# EAGLE board OPT-FMU-v.0.1 (EAGLE 5.11), part 1 of 3
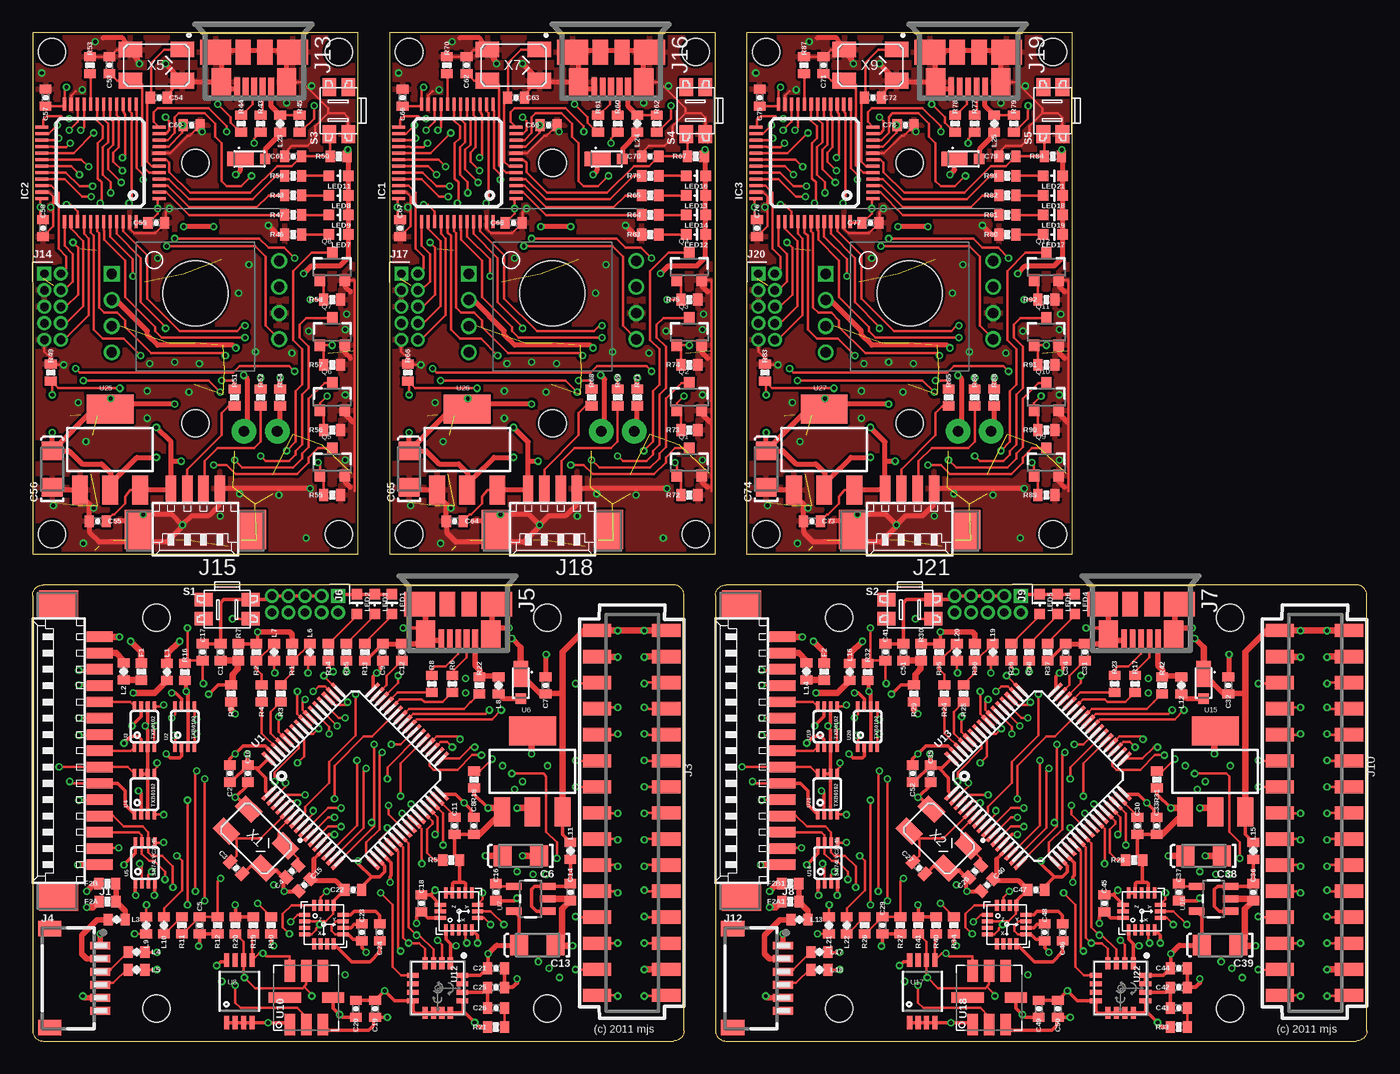
[diagram p0: board, top side]
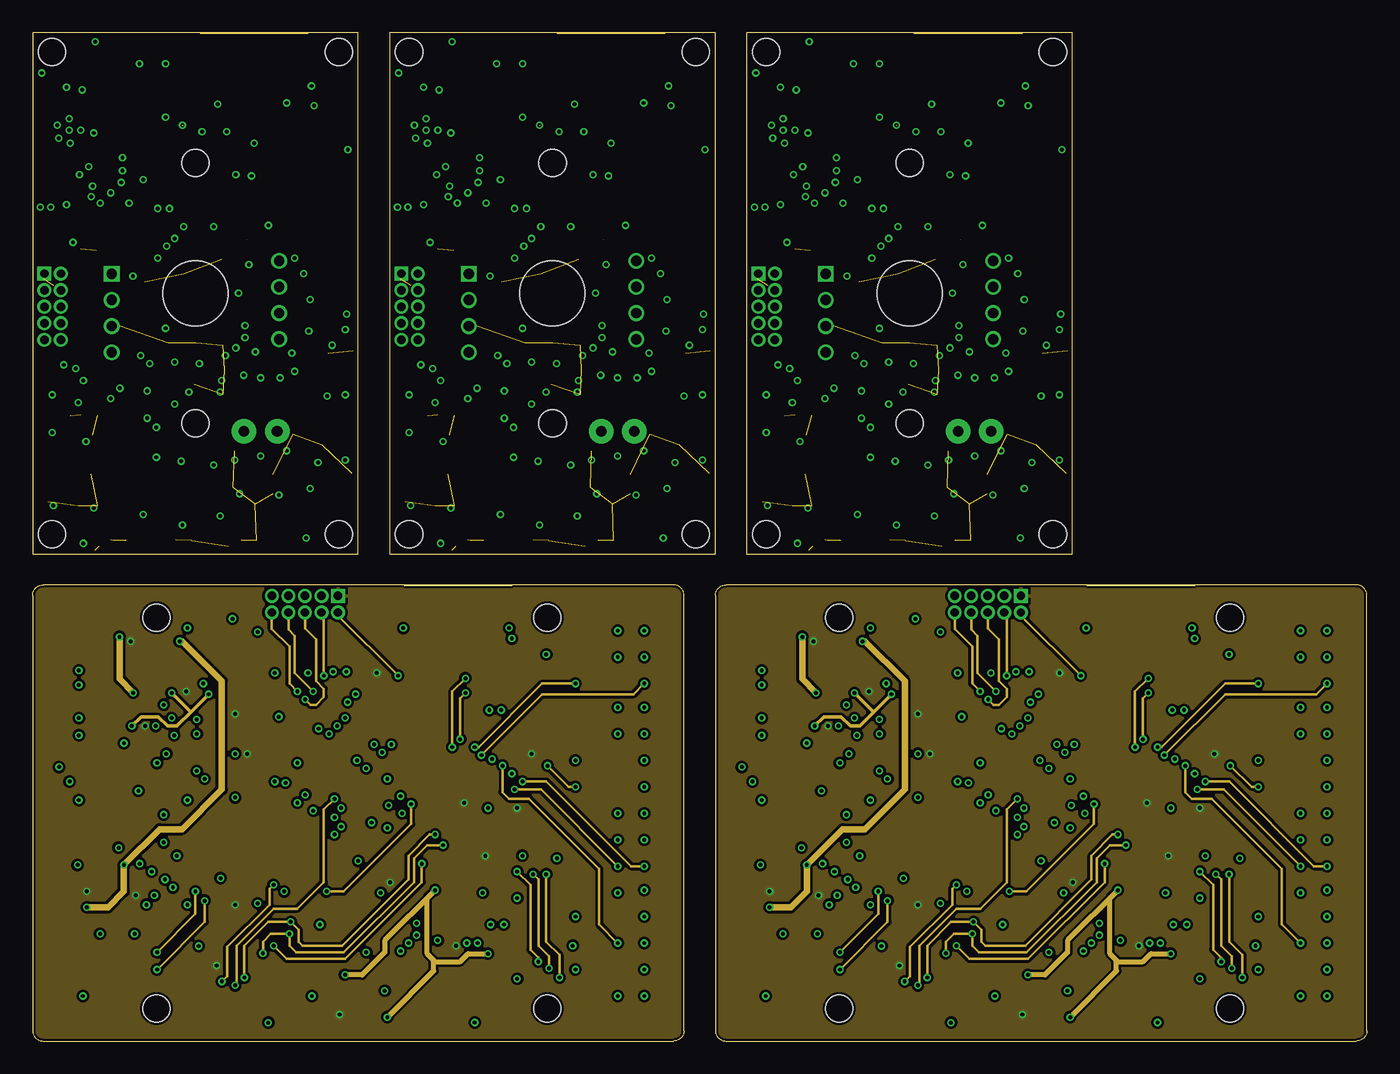
[diagram p1: board, inner layer Route2]
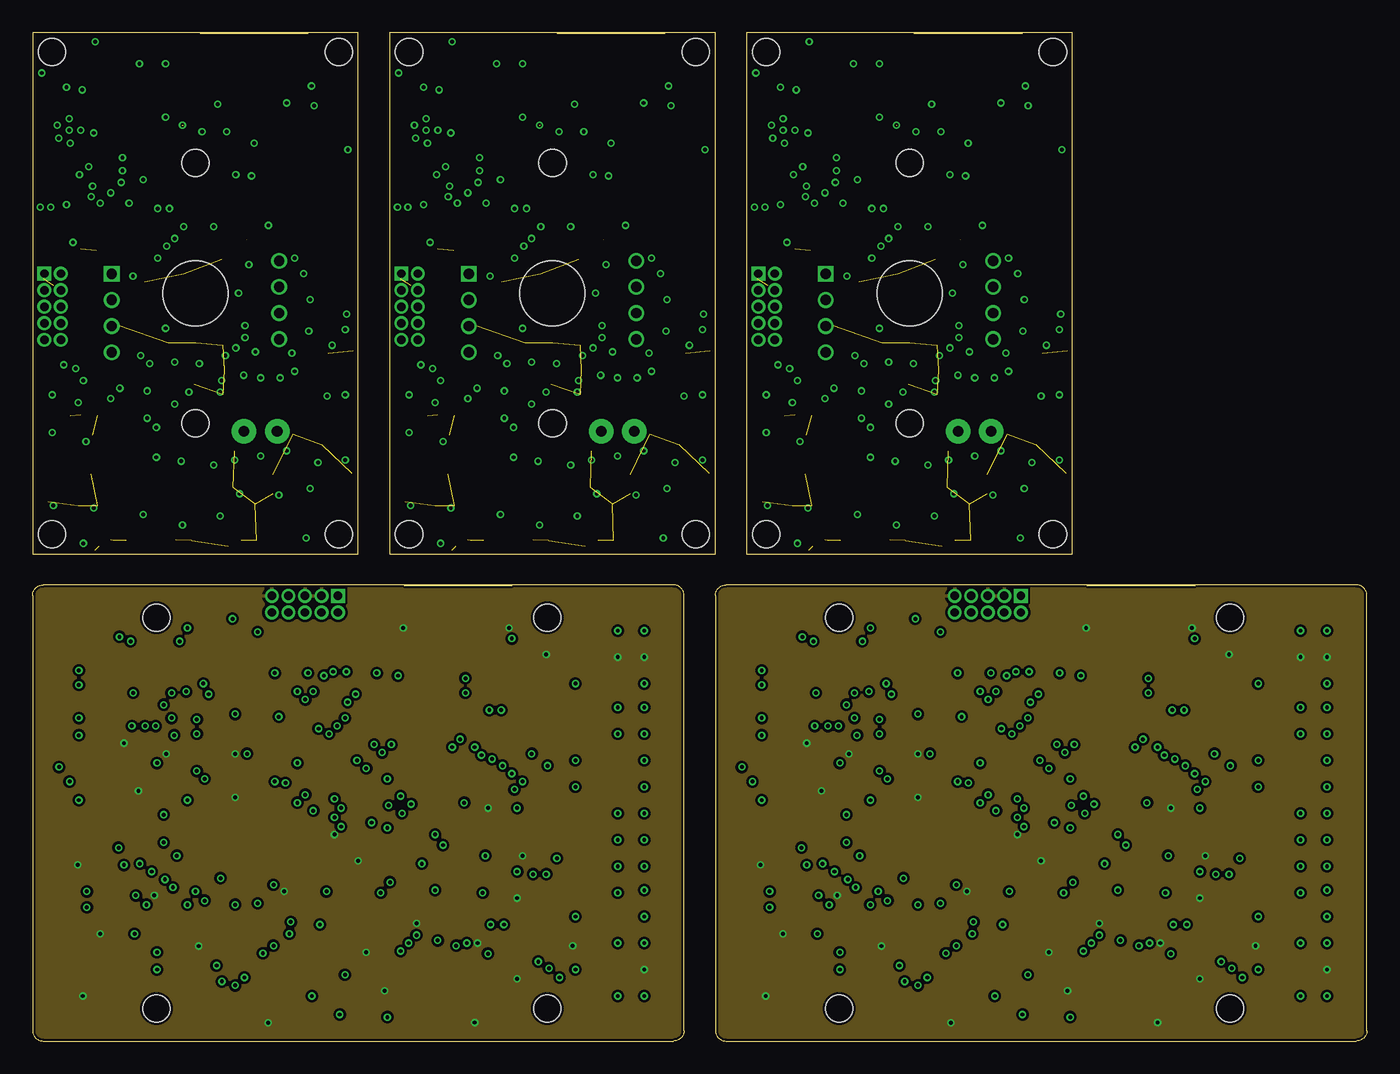
[diagram p2: board, inner layer Route15]
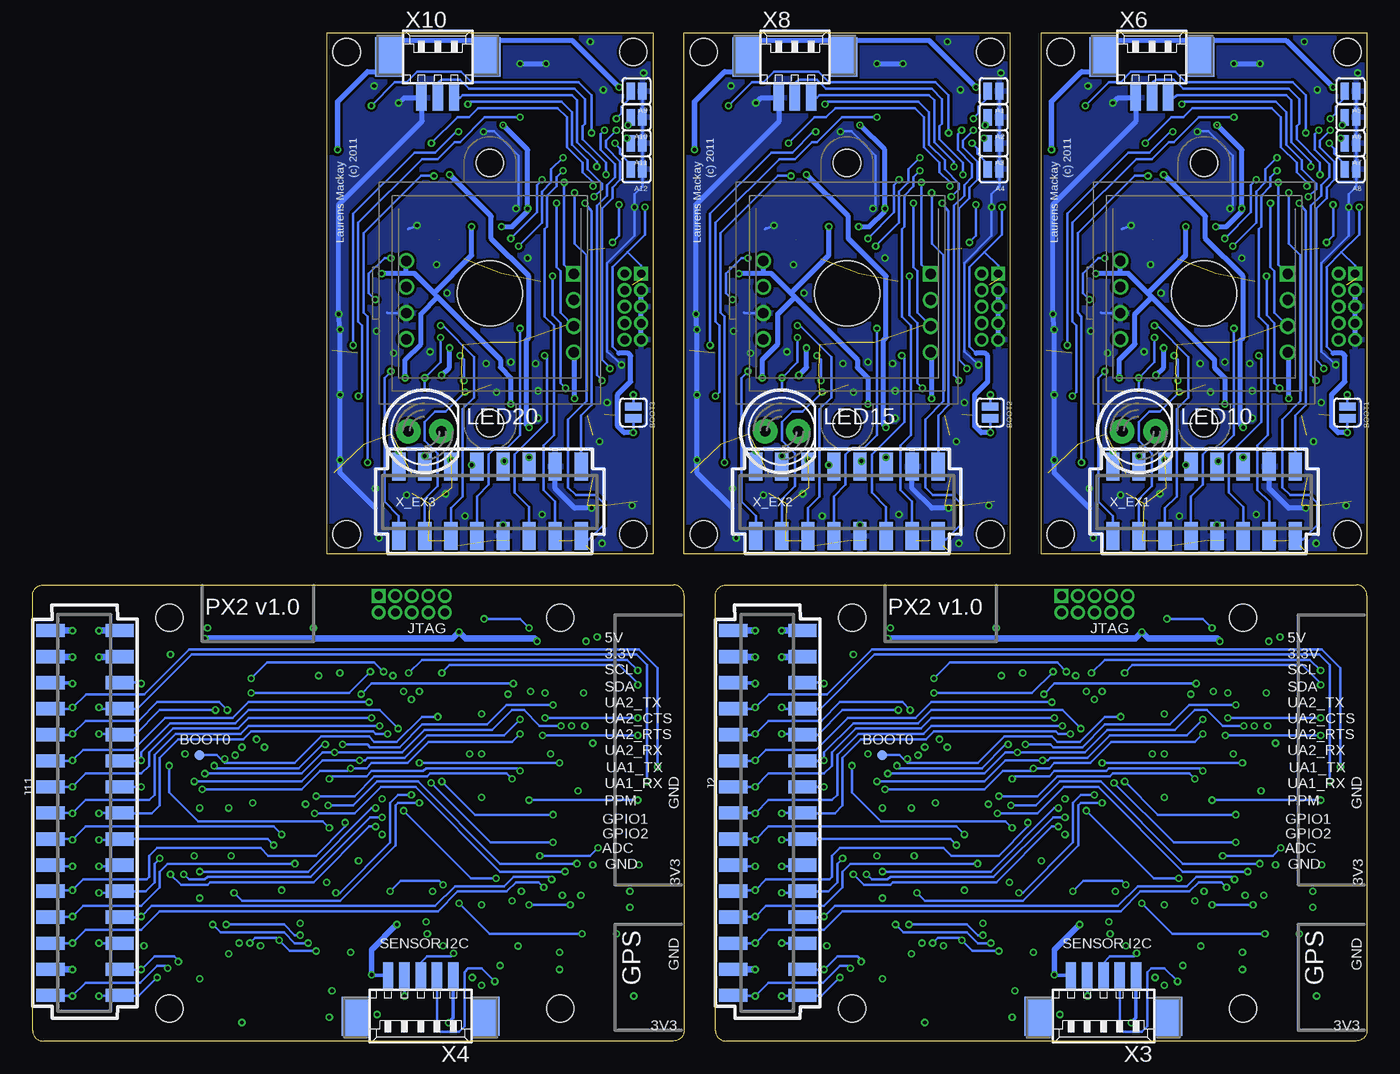
[diagram p3: board, bottom side, seen from below]

Size 102.4 x 77.4 mm. Coordinates in mm from the lower left corner, seen from the top.
Outline: 0,0.8 arc90 0.8,0 49.2,0 arc90 50,0.8 50,34.2 arc90 49.2,35 0.8,35 arc90 0,34.2 0,0.8
Outline: 52.4,0.8 arc90 53.2,0 101.6,0 arc90 102.4,0.8 102.4,34.2 arc90 101.6,35 53.2,35 arc90 52.4,34.2 52.4,0.8
Outline: 25,37.4 25,77.4 0,77.4 0,37.4 25,37.4
Outline: 52.4,37.4 52.4,77.4 27.4,77.4 27.4,37.4 52.4,37.4
Outline: 79.8,37.4 79.8,77.4 54.8,77.4 54.8,37.4 79.8,37.4
Copper layers (1*2*15*16): Top 0.035mm / dielectric 0.5mm / Route2 0.035mm / dielectric 0.5mm / Route15 0.035mm / dielectric 0.5mm / Bottom 0.035mm
Design rules "pixhawk2": minimum track width 0.15mm, minimum drill 0.3mm, track to track 0.15mm, track to pad 0.15mm, pad to pad 0.15mm, via to via 0.15mm, smd to smd 0.15mm, copper to edge 0.2mm, drill to drill 0.2mm, minimum pad ring 0.125mm, minimum via ring 0.125mm, stop-mask expansion 1mil, vias tented up to drill 0.31mm, thermal gap 8mil
Net classes: 0 signal: width 0.2 mm, drill 0.3 mm, clearance 0.2 mm; 1 power: width 0.2 mm, drill 0.3 mm, clearance 0.2 mm

## Footprints (pad centres in the part's own frame; a part is rotated, then mirrored left to right if it is on the bottom)
SJ_2 = smd 0.635 x 1.27: 1 -0.889,0; 2 0,0
0402-CAP = smd 0.7 x 0.9: 1 -0.65,0; 2 0.65,0
EIA3216 = smd 1.4 x 1.6: A 1.4,0; C -1.4,0
MICROSMP = smd 0.8 x 0.8: ANODE 0.65,0 | smd 2 x 1.1: CATHODE -1.25,0
0402-PTC = smd 0.7 x 0.9: 1 -0.65,0; 2 0.65,0
TQFP48 = smd 0.24 x 1: 1 -2.75,-4.5; 2 -2.25,-4.5; 3 -1.75,-4.5; 4 -1.25,-4.5; 5 -0.75,-4.5; 6 -0.25,-4.5; 7 0.25,-4.5; 8 0.75,-4.5; 9 1.25,-4.5; 10 1.75,-4.5; 11 2.25,-4.5; 12 2.75,-4.5; 25 2.75,4.5; 26 2.25,4.5; 27 1.75,4.5; 28 1.25,4.5; 29 0.75,4.5; 30 0.25,4.5; 31 -0.25,4.5; 32 -0.75,4.5; 33 -1.25,4.5; 34 -1.75,4.5; 35 -2.25,4.5; 36 -2.75,4.5 | smd 1 x 0.24: 13 4.5,-2.75; 14 4.5,-2.25; 15 4.5,-1.75; 16 4.5,-1.25; 17 4.5,-0.75; 18 4.5,-0.25; 19 4.5,0.25; 20 4.5,0.75; 21 4.5,1.25; 22 4.5,1.75; 23 4.5,2.25; 24 4.5,2.75; 37 -4.5,2.75; 38 -4.5,2.25; 39 -4.5,1.75; 40 -4.5,1.25; 41 -4.5,0.75; 42 -4.5,0.25; 43 -4.5,-0.25; 44 -4.5,-0.75; 45 -4.5,-1.25; 46 -4.5,-1.75; 47 -4.5,-2.25; 48 -4.5,-2.75
53261-15 = smd 0.8 x 2: 1 8.75,-2.5; 2 7.5,-2.5; 3 6.25,-2.5; 4 5,-2.5; 5 3.75,-2.5; 6 2.5,-2.5; 7 1.25,-2.5; 8 0,-2.5; 9 -1.25,-2.5; 10 -2.5,-2.5; 11 -3.75,-2.5; 12 -5,-2.5; 13 -6.25,-2.5; 14 -7.5,-2.5; 15 -8.75,-2.5 | smd 2.1 x 3: S1 11.25,0.625; S2 -11.25,0.625
HEADER_2MM_2X15_REVERSE = smd 1.02 x 2.16: 1 -14,-2.655; 2 -14,2.655; 3 -12,-2.655; 4 -12,2.655; 5 -10,-2.655; 6 -10,2.655; 7 -8,-2.655; 8 -8,2.655; 9 -6,-2.655; 10 -6,2.655; 11 -4,-2.655; 12 -4,2.655; 13 -2,-2.655; 14 -2,2.655; 15 0,-2.655; 16 0,2.655; 17 2,-2.655; 18 2,2.655; 19 4,-2.655; 20 4,2.655; 21 6,-2.655; 22 6,2.655; 23 8,-2.655; 24 8,2.655; 25 10,-2.655; 26 10,2.655; 27 12,-2.655; 28 12,2.655; 29 14,-2.655; 30 14,2.655
HEADER_2MM_2X15 = smd 1.02 x 2.16: 1 14,-2.655; 2 14,2.655; 3 12,-2.655; 4 12,2.655; 5 10,-2.655; 6 10,2.655; 7 8,-2.655; 8 8,2.655; 9 6,-2.655; 10 6,2.655; 11 4,-2.655; 12 4,2.655; 13 2,-2.655; 14 2,2.655; 15 0,-2.655; 16 0,2.655; 17 -2,-2.655; 18 -2,2.655; 19 -4,-2.655; 20 -4,2.655; 21 -6,-2.655; 22 -6,2.655; 23 -8,-2.655; 24 -8,2.655; 25 -10,-2.655; 26 -10,2.655; 27 -12,-2.655; 28 -12,2.655; 29 -14,-2.655; 30 -14,2.655
SM06B-SRSS-TB = smd 0.6 x 1.55: 1 -2.5,2.975; 2 -1.5,2.975; 3 -0.5,2.975; 4 0.5,2.975; 5 1.5,2.975; 6 2.5,2.975 | smd 1.2 x 1.8: FIT@1 -3.8,-0.9; FIT@2 3.8,-0.9
MOLEX-47346-0001 = smd 1.7 x 0.44: 1 2.8,1.3; 2 2.8,0.65; 3 2.8,0; 4 2.8,-0.65; 5 2.8,-1.3 | smd 1.9 x 2.375: GND1 0,2.95; GND4 0,-2.95 | smd 2.1 x 1.475: GND2 2.3,2.5; GND3 2.3,-2.5 | smd 1.9 x 1.175: GND5 0,-0.838; GND6 0,0.838
FTSH-105-01-XXX-DV = drill 0.65 pad 1.06 square: 1 0,0 | drill 0.65 pad 1.06 round: 2 0,1.27; 3 1.27,0; 4 1.27,1.27; 5 2.54,0; 6 2.54,1.27; 7 3.81,0; 8 3.81,1.27; 9 5.08,0; 10 5.08,1.27
53261-04 = smd 0.8 x 2: 1 1.875,-2.5; 2 0.625,-2.5; 3 -0.625,-2.5; 4 -1.875,-2.5 | smd 2.1 x 3: S1 4.375,0.625; S2 -4.375,0.625
0402-IND = smd 0.7 x 0.9: 1 -0.65,0; 2 0.65,0
LED-0603 = smd 0.8 x 0.8: A 0,-0.75; C 0,0.75
LED5MM = drill 0.813 pad 1.88 round: A -1.27,0; K 1.27,0
SOT23-3 = smd 0.8 x 0.9: 1 -0.95,-1; 2 0.95,-1; 3 0,1.1
0402-RES = smd 0.7 x 0.9: 1 -0.65,0; 2 0.65,0
EVQP7J01K = smd 1.4 x 1.05: A1 -1.8,0.725; A2 1.8,0.725; B3 -1.8,-0.725; B4 1.8,-0.725
PAD.03X.03 = smd 0.762 x 0.762: P$1 0,0
TQFP64 = smd 1.2 x 0.29: 1 -5.7,3.75; 2 -5.7,3.25; 3 -5.7,2.75; 4 -5.7,2.25; 5 -5.7,1.75; 6 -5.7,1.25; 7 -5.7,0.75; 8 -5.7,0.25; 9 -5.7,-0.25; 10 -5.7,-0.75; 11 -5.7,-1.25; 12 -5.7,-1.75; 13 -5.7,-2.25; 14 -5.7,-2.75; 15 -5.7,-3.25; 16 -5.7,-3.75; 33 5.7,-3.75; 34 5.7,-3.25; 35 5.7,-2.75; 36 5.7,-2.25; 37 5.7,-1.75; 38 5.7,-1.25; 39 5.7,-0.75; 40 5.7,-0.25; 41 5.7,0.25; 42 5.7,0.75; 43 5.7,1.25; 44 5.7,1.75; 45 5.7,2.25; 46 5.7,2.75; 47 5.7,3.25; 48 5.7,3.75 | smd 0.29 x 1.2: 17 -3.75,-5.7; 18 -3.25,-5.7; 19 -2.75,-5.7; 20 -2.25,-5.7; 21 -1.75,-5.7; 22 -1.25,-5.7; 23 -0.75,-5.7; 24 -0.25,-5.7; 25 0.25,-5.7; 26 0.75,-5.7; 27 1.25,-5.7; 28 1.75,-5.7; 29 2.25,-5.7; 30 2.75,-5.7; 31 3.25,-5.7; 32 3.75,-5.7; 49 3.75,5.7; 50 3.25,5.7; 51 2.75,5.7; 52 2.25,5.7; 53 1.75,5.7; 54 1.25,5.7; 55 0.75,5.7; 56 0.25,5.7; 57 -0.25,5.7; 58 -0.75,5.7; 59 -1.25,5.7; 60 -1.75,5.7; 61 -2.25,5.7; 62 -2.75,5.7; 63 -3.25,5.7; 64 -3.75,5.7
TI-DCU = smd 0.27 x 0.8: 1 -0.75,-1.55; 2 -0.25,-1.55; 3 0.25,-1.55; 4 0.75,-1.55; 5 0.75,1.55; 6 0.25,1.55; 7 -0.25,1.55; 8 -0.75,1.55
SOT-223 = smd 1.219 x 2.235: 1 -2.311,-3.099; 2 0,-3.099; 3 2.311,-3.099 | smd 3.6 x 2.2: 4 0,3.099
SOT23-5 = smd 0.55 x 1.2: 1 -0.95,-1.3; 2 0,-1.3; 3 0.95,-1.3; 4 0.95,1.3; 5 -0.95,1.3
MSOP-8 = smd 0.41 x 1.02: 1 -0.975,-2.4; 2 -0.325,-2.4; 3 0.325,-2.4; 4 0.975,-2.4; 5 0.975,2.4; 6 0.325,2.4; 7 -0.325,2.4; 8 -0.975,2.4
LIS331DLH-MAN = smd 0.85 x 0.285: 1 -1.425,1; 2 -1.425,0.5; 3 -1.425,0; 4 -1.425,-0.5; 5 -1.425,-1; 9 1.425,-1; 10 1.425,-0.5; 11 1.425,0; 12 1.425,0.5; 13 1.425,1 | smd 0.285 x 0.85: 6 -0.5,-1.425; 7 0,-1.425; 8 0.5,-1.425; 14 0.5,1.425; 15 0,1.425; 16 -0.5,1.425
BMP085 = smd 1.67 x 0.8: 1 -2.065,1.27; 2 -2.065,0; 3 -2.065,-1.27; 5 2.065,-1.27; 6 2.065,0; 7 2.065,1.27 | smd 0.8 x 1.67: 4 0,-2.065 | smd 0.8 x 2.5: 8 0,1.65
HMC5883L-MAN = smd 0.85 x 0.285: 1 -1.475,0.75; 2 -1.475,0.25; 3 -1.475,-0.25; 4 -1.475,-0.75; 9 1.475,-0.75; 10 1.475,-0.25; 11 1.475,0.25; 12 1.475,0.75 | smd 0.285 x 0.85: 5 -0.75,-1.475; 6 -0.25,-1.475; 7 0.25,-1.475; 8 0.75,-1.475; 13 0.75,1.475; 14 0.25,1.475; 15 -0.25,1.475; 16 -0.75,1.475
L3G4200DH-MAN = smd 0.9 x 0.4: 1 -1.9,0.975; 2 -1.9,0.325; 3 -1.9,-0.325; 4 -1.9,-0.975; 9 1.9,-0.975; 10 1.9,-0.325; 11 1.9,0.325; 12 1.9,0.975 | smd 0.4 x 0.9: 5 -0.975,-1.9; 6 -0.325,-1.9; 7 0.325,-1.9; 8 0.975,-1.9; 13 0.975,1.9; 14 0.325,1.9; 15 -0.325,1.9; 16 -0.975,1.9
MOUNT-HOLE2.1 = hole 2.1: 0,0
LENSMOUNT_M12 = hole 2.1: 10,0; -10,0
ADNS-2080 = drill 0.8 square: 1 6.425,-1.47 | drill 0.8 round: 2 6.425,0.53; 3 6.425,2.53; 4 6.425,4.53; 5 -6.425,3.53; 6 -6.425,1.53; 7 -6.425,-0.47; 8 -6.425,-2.47 | hole 5: 0,0
OSCILLATOR-5.0X3.2 = smd 1.8 x 1.2: 1 -2,-1.2; 2 2,-1.2; 3 2,1.2; 4 -2,1.2
53261-05 = smd 0.8 x 2: 1 2.5,-2.5; 2 1.25,-2.5; 3 0,-2.5; 4 -1.25,-2.5; 5 -2.5,-2.5 | smd 2.1 x 3: S1 5,0.625; S2 -5,0.625
53261-03 = smd 0.8 x 2: 1 1.25,-2.5; 2 0,-2.5; 3 -1.25,-2.5 | smd 2.1 x 3: S1 3.75,0.625; S2 -3.75,0.625
HEADER_2MM_2X8 = smd 1.02 x 2.16: 1 7,-2.925; 2 7,2.385; 3 5,-2.925; 4 5,2.385; 5 3,-2.925; 6 3,2.385; 7 1,-2.925; 8 1,2.385; 9 -1,-2.925; 10 -1,2.385; 11 -3,-2.925; 12 -3,2.385; 13 -5,-2.925; 14 -5,2.385; 15 -7,-2.925; 16 -7,2.385

## Placement (x,y rotation side)
A1  [SJ_2]  29.1,72.9 180 bottom
A2  [SJ_2]  29.1,70.9 180 bottom
A3  [SJ_2]  29.1,68.9 180 bottom
A4  [SJ_2]  29.1,66.9 180 bottom
A5  [SJ_2]  1.7,72.9 180 bottom
A6  [SJ_2]  1.7,70.9 180 bottom
A7  [SJ_2]  1.7,68.9 180 bottom
A8  [SJ_2]  1.7,66.9 180 bottom
A9  [SJ_2]  56.5,72.9 180 bottom
A10  [SJ_2]  56.5,70.9 180 bottom
A11  [SJ_2]  56.5,68.9 180 bottom
A12  [SJ_2]  56.5,66.9 180 bottom
BOOT1  [SJ_2]  1.5,47.8 270 bottom
BOOT2  [SJ_2]  28.9,47.8 270 bottom
BOOT3  [SJ_2]  56.3,47.8 270 bottom
C1  0u1  [0402-CAP]  14.43,29.84 90 top
C2  0u1  [0402-CAP]  15.14,20.52 90 top
C3  10p  [0402-CAP]  15.62,13.29 315 top
C4  10p  [0402-CAP]  19.92,13.03 45 top
C5  0u1  [0402-CAP]  12.83,8.89 270 top
C6  10u  [EIA3216]  37.47,14.22 180 top
C7  0u1  [0402-CAP]  39.37,27.3 90 top
C8  0u1  [0402-CAP]  33.86,16.51 270 top
C9  0u1  [0402-CAP]  26.87,29.84 90 top
C10  0u1  [0402-CAP]  16.53,20.52 270 top
C11  2u2  [0402-CAP]  32.38,16.51 270 top
C12  2u2  [0402-CAP]  28.35,29.84 90 top
C13  10u  [EIA3216]  38.73,7.37 180 top
C14  0u1  [0402-CAP]  41.27,11.43 270 top
C15  0u1  [0402-CAP]  20.86,11.97 225 top
C16  470p  [0402-CAP]  35.56,11.43 270 top
C17  0u1  [0402-CAP]  13.06,29.84 270 top
C18  0u1  [0402-CAP]  29.84,10.57 270 top
C19  0u1  [0402-CAP]  26.29,2.46 90 top
C20  0u1  [0402-CAP]  24.82,2.46 90 top
C21  0u1  [0402-CAP]  35.56,5.59 0 top
C22  0u1  [0402-CAP]  24.61,11.61 0 top
C23  4u7  [0402-CAP]  25.27,8.36 270 top
C24  0u22  [0402-CAP]  26.64,8.36 90 top
C25  0u01  [0402-CAP]  35.56,4.11 0 top
C26  0u47  [0402-CAP]  35.56,2.54 0 top
C27  10p  [0402-CAP]  68.02,13.29 315 top
C28  10p  [0402-CAP]  72.32,13.03 45 top
C29  0u1  [0402-CAP]  65.23,8.89 270 top
C30  2u2  [0402-CAP]  84.78,16.51 270 top
C31  2u2  [0402-CAP]  80.75,29.84 90 top
C32  0u1  [0402-CAP]  91.77,27.3 90 top
C33  0u1  [0402-CAP]  86.26,16.51 270 top
C34  0u1  [0402-CAP]  79.27,29.84 90 top
C35  0u1  [0402-CAP]  68.93,20.52 270 top
C36  0u1  [0402-CAP]  93.67,11.43 270 top
C37  470p  [0402-CAP]  87.96,11.43 270 top
C38  10u  [EIA3216]  89.86,14.22 180 top
C39  10u  [EIA3216]  91.14,7.37 180 top
C40  0u1  [0402-CAP]  73.26,11.97 225 top
C41  0u1  [0402-CAP]  65.46,29.84 270 top
C42  0u01  [0402-CAP]  87.96,4.11 0 top
C43  0u47  [0402-CAP]  87.96,2.54 0 top
C44  0u1  [0402-CAP]  87.96,5.59 0 top
C45  0u1  [0402-CAP]  82.25,10.57 270 top
C46  0u22  [0402-CAP]  79.04,8.36 90 top
C47  0u1  [0402-CAP]  77.01,11.61 0 top
C48  4u7  [0402-CAP]  77.67,8.36 270 top
C49  0u1  [0402-CAP]  77.22,2.46 90 top
C50  0u1  [0402-CAP]  78.69,2.46 90 top
C51  0u1  [0402-CAP]  66.83,29.84 90 top
C52  0u1  [0402-CAP]  67.54,20.52 90 top
C53  10p  [0402-CAP]  5.9,74.9 90 top
C54  10p  [0402-CAP]  9.7,72.4 180 top
C55  0u1  [0402-CAP]  5,39.9 180 top
C56  10u  [EIA3216]  1.5,43.9 90 top
C57  0u1  [0402-CAP]  1,72.4 90 top
C58  0u1  [0402-CAP]  0.8,62.4 270 top
C59  0u1  [0402-CAP]  9.5,62.8 0 top
C60  0u1  [0402-CAP]  12.2,70.3 0 top
C61  0u1  [0402-CAP]  20,67.9 0 top
C62  10p  [0402-CAP]  33.3,74.9 90 top
C63  10p  [0402-CAP]  37.1,72.4 180 top
C64  0u1  [0402-CAP]  32.4,39.9 180 top
C65  10u  [EIA3216]  28.9,43.9 90 top
C66  0u1  [0402-CAP]  28.4,72.4 90 top
C67  0u1  [0402-CAP]  28.2,62.4 270 top
C68  0u1  [0402-CAP]  36.9,62.8 0 top
C69  0u1  [0402-CAP]  39.6,70.3 0 top
C70  0u1  [0402-CAP]  47.4,67.9 0 top
C71  10p  [0402-CAP]  60.7,74.9 90 top
C72  10p  [0402-CAP]  64.5,72.4 180 top
C73  0u1  [0402-CAP]  59.8,39.9 180 top
C74  10u  [EIA3216]  56.3,43.9 90 top
C75  0u1  [0402-CAP]  55.8,72.4 90 top
C76  0u1  [0402-CAP]  55.6,62.4 270 top
C77  0u1  [0402-CAP]  64.3,62.8 0 top
C78  0u1  [0402-CAP]  67,70.3 0 top
C79  0u1  [0402-CAP]  74.8,67.9 0 top
D1  MSS1P4-M3  [MICROSMP]  37.47,26.92 270 top
D2  MSS1P4-M3  [MICROSMP]  89.86,26.92 270 top
D3  MSS1P4-M3  [MICROSMP]  17.2,67.7 0 top
D4  MSS1P4-M3  [MICROSMP]  44.6,67.7 0 top
D5  MSS1P4-M3  [MICROSMP]  72,67.7 0 top
F1  500mA  [0402-PTC]  8.35,28.35 270 top
F2  500mA  [0402-PTC]  60.75,28.35 270 top
F2A  150mA  [0402-PTC]  5.75,10.7 0 top
F2A1  150mA  [0402-PTC]  58.15,10.7 0 top
F2B  150mA  [0402-PTC]  5.74,12.09 0 top
F2B1  150mA  [0402-PTC]  58.14,12.09 0 top
IC1  STM32F10XCXT6  [TQFP48]  32.6,67.4 90 top
IC2  STM32F10XCXT6  [TQFP48]  5.2,67.4 90 top
IC3  STM32F10XCXT6  [TQFP48]  60,67.4 90 top
J1  53261-15  [53261-15]  2.64,22.28 90 top
J2  HEADER_2X15-REV  [HEADER_2MM_2X15_REVERSE]  45.97,17.51 270 bottom
J3  HEADER_2X15  [HEADER_2MM_2X15]  45.97,17.51 90 top
J4  SM06B-SRSS-TB  [SM06B-SRSS-TB]  2.22,4.83 270 top
J5  47346-0001  [MOLEX-47346-0001]  32.66,33.53 270 top
J6  ARM_MINI_JTAG-TH  [FTSH-105-01-XXX-DV]  23.44,34.16 180 top
J7  47346-0001  [MOLEX-47346-0001]  85.06,33.53 270 top
J8  53261-15  [53261-15]  55.04,22.28 90 top
J9  ARM_MINI_JTAG-TH  [FTSH-105-01-XXX-DV]  75.84,34.16 180 top
J10  HEADER_2X15  [HEADER_2MM_2X15]  98.37,17.51 90 top
J11  HEADER_2X15-REV  [HEADER_2MM_2X15_REVERSE]  98.37,17.51 270 bottom
J12  SM06B-SRSS-TB  [SM06B-SRSS-TB]  54.62,4.83 270 top
J13  47346-0001  [MOLEX-47346-0001]  17,75.9 270 top
J14  ARM_MINI_JTAG-TH  [FTSH-105-01-XXX-DV]  0.9,58.9 270 top
J15  53047-04  [53261-04]  12.5,39.9 180 top
J16  47346-0001  [MOLEX-47346-0001]  44.4,75.9 270 top
J17  ARM_MINI_JTAG-TH  [FTSH-105-01-XXX-DV]  28.3,58.9 270 top
J18  53047-04  [53261-04]  39.9,39.9 180 top
J19  47346-0001  [MOLEX-47346-0001]  71.8,75.9 270 top
J20  ARM_MINI_JTAG-TH  [FTSH-105-01-XXX-DV]  55.7,58.9 270 top
J21  53047-04  [53261-04]  67.3,39.9 180 top
L1  FERRITE  [0402-IND]  10.31,28.32 270 top
L2  FERRITE  [0402-IND]  6.99,28.37 90 top
L3  FERRITE  [0402-IND]  6.45,9.32 180 top
L4  FERRITE  [0402-IND]  7.98,6.83 180 top
L5  FERRITE  [0402-IND]  7.98,5.46 180 top
L6  FERRITE  [0402-IND]  21.29,29.84 270 top
L7  FERRITE  [0402-IND]  18.54,29.84 270 top
L8  FERRITE  [0402-IND]  35.76,27.3 90 top
L9  FERRITE  [0402-IND]  8.71,8.89 90 top
L10  FERRITE  [0402-IND]  10.08,8.89 90 top
L11  FERRITE  [0402-IND]  41.27,14.61 270 top
L12  FERRITE  [0402-IND]  88.16,27.3 90 top
L13  FERRITE  [0402-IND]  58.85,9.32 180 top
L14  FERRITE  [0402-IND]  59.38,28.37 90 top
L15  FERRITE  [0402-IND]  93.67,14.61 270 top
L16  FERRITE  [0402-IND]  62.71,28.32 270 top
L17  FERRITE  [0402-IND]  60.38,6.83 180 top
L18  FERRITE  [0402-IND]  60.38,5.46 180 top
L19  FERRITE  [0402-IND]  73.69,29.84 270 top
L20  FERRITE  [0402-IND]  70.94,29.84 270 top
L21  FERRITE  [0402-IND]  61.11,8.89 90 top
L22  FERRITE  [0402-IND]  62.48,8.89 90 top
L23  FERRITE  [0402-IND]  19,70.4 90 top
L24  FERRITE  [0402-IND]  46.4,70.4 90 top
L25  FERRITE  [0402-IND]  73.8,70.4 90 top
LED1  GREEN  [LED-0603]  27.58,33.53 180 top
LED2  AMBER  [LED-0603]  24.89,33.53 180 top
LED3  BLUE  [LED-0603]  26.26,33.53 180 top
LED4  GREEN  [LED-0603]  79.98,33.53 180 top
LED5  AMBER  [LED-0603]  77.29,33.53 180 top
LED6  BLUE  [LED-0603]  78.66,33.53 180 top
LED7  GREEN  [LED-0603]  23.5,61.9 90 top
LED8  AMBER  [LED-0603]  23.5,64.9 90 top
LED9  BLUE  [LED-0603]  23.5,63.4 90 top
LED10  [LED5MM]  17.5,46.8 0 bottom
LED11  RED  [LED-0603]  23.5,66.4 90 top
LED12  GREEN  [LED-0603]  50.9,61.9 90 top
LED13  AMBER  [LED-0603]  50.9,64.9 90 top
LED14  BLUE  [LED-0603]  50.9,63.4 90 top
LED15  [LED5MM]  44.9,46.8 0 bottom
LED16  RED  [LED-0603]  50.9,66.4 90 top
LED17  GREEN  [LED-0603]  78.3,61.9 90 top
LED18  AMBER  [LED-0603]  78.3,64.9 90 top
LED19  BLUE  [LED-0603]  78.3,63.4 90 top
LED20  [LED5MM]  72.3,46.8 0 bottom
LED21  RED  [LED-0603]  78.3,66.4 90 top
Q1  BSSXX  [SOT23-3]  50.4,44.4 0 top
Q2  BSSXX  [SOT23-3]  50.4,49.4 0 top
Q3  BSSXX  [SOT23-3]  50.4,54.4 0 top
Q4  BSSXX  [SOT23-3]  50.4,59.4 0 top
Q5  BSSXX  [SOT23-3]  23,44.4 0 top
Q6  BSSXX  [SOT23-3]  23,49.4 0 top
Q7  BSSXX  [SOT23-3]  23,54.4 0 top
Q8  BSSXX  [SOT23-3]  23,59.4 0 top
Q9  BSSXX  [SOT23-3]  77.8,44.4 0 top
Q10  BSSXX  [SOT23-3]  77.8,49.4 0 top
Q11  BSSXX  [SOT23-3]  77.8,54.4 0 top
Q12  BSSXX  [SOT23-3]  77.8,59.4 0 top
R1  4K7  [0402-RES]  19.91,29.84 90 top
R2  4K7  [0402-RES]  17.17,29.84 90 top
R3  100  [0402-RES]  19.05,26.67 90 top
R4  100  [0402-RES]  17.58,26.67 90 top
R5  10K  [0402-RES]  32.13,13.89 0 top
R6  22R  [0402-RES]  32.21,27.41 270 top
R7  0  [0402-RES]  15.8,29.84 270 top
R8  22R  [0402-RES]  30.63,27.41 270 top
R9  0  [0402-RES]  15.24,26.67 90 top
R10  1K0  [0402-RES]  18.31,8.89 90 top
R11  39K/1%  [0402-RES]  11.46,8.89 90 top
R12  10K/1%  [0402-RES]  14.2,8.89 90 top
R13  220R  [0402-RES]  25.5,29.84 90 top
R14  68  [0402-RES]  22.71,29.84 90 top
R15  220R  [0402-RES]  24.08,29.84 90 top
R16  10K  [0402-RES]  11.68,28.32 270 top
R17  22R  [0402-RES]  84.61,27.41 270 top
R18  10K  [0402-RES]  33.88,20.07 90 top
R19  4K7  [0402-RES]  16.94,8.89 90 top
R20  4K7  [0402-RES]  15.57,8.89 90 top
R21  10K  [0402-RES]  35.56,1.07 0 top
R22  10K  [0402-RES]  34.29,27.3 270 top
R23  22R  [0402-RES]  83.03,27.41 270 top
R24  100  [0402-RES]  69.98,26.67 90 top
R25  100  [0402-RES]  71.45,26.67 90 top
R26  39K/1%  [0402-RES]  63.86,8.89 90 top
R27  10K/1%  [0402-RES]  66.6,8.89 90 top
R28  10K  [0402-RES]  84.53,13.89 0 top
R29  0  [0402-RES]  67.64,26.67 90 top
R30  0  [0402-RES]  68.2,29.84 270 top
R31  10K  [0402-RES]  86.28,20.07 90 top
R32  10K  [0402-RES]  64.08,28.32 270 top
R33  10K  [0402-RES]  87.96,1.07 0 top
R34  1K0  [0402-RES]  70.71,8.89 90 top
R35  4K7  [0402-RES]  69.57,29.84 90 top
R36  4K7  [0402-RES]  72.31,29.84 90 top
R37  220R  [0402-RES]  77.9,29.84 90 top
R38  220R  [0402-RES]  76.48,29.84 90 top
R39  68  [0402-RES]  75.11,29.84 90 top
R40  4K7  [0402-RES]  69.34,8.89 90 top
R41  4K7  [0402-RES]  67.97,8.89 90 top
R42  10K  [0402-RES]  86.69,27.3 270 top
R43  22R  [0402-RES]  17.5,70.4 270 top
R44  22R  [0402-RES]  16,70.4 270 top
R45  10K  [0402-RES]  20.5,70.4 270 top
R46  220R  [0402-RES]  20,61.9 0 top
R47  220R  [0402-RES]  20,63.4 0 top
R48  68  [0402-RES]  20,64.9 0 top
R49  10K  [0402-RES]  1.4,51.3 270 top
R50  10K  [0402-RES]  23.5,67.9 0 top
R51  100R  [0402-RES]  15.5,49.4 270 top
R52  100R  [0402-RES]  17.5,49.4 270 top
R53  10K  [0402-RES]  4.4,74.9 270 top
R54  68R  [0402-RES]  19,49.4 270 top
R55  10K  [0402-RES]  23,41.9 0 top
R56  10K  [0402-RES]  23,46.9 0 top
R57  10K  [0402-RES]  23,51.9 0 top
R58  10K  [0402-RES]  23,56.9 0 top
R59  220R  [0402-RES]  20,66.4 0 top
R60  22R  [0402-RES]  44.9,70.4 270 top
R61  22R  [0402-RES]  43.4,70.4 270 top
R62  10K  [0402-RES]  47.9,70.4 270 top
R63  220R  [0402-RES]  47.4,61.9 0 top
R64  220R  [0402-RES]  47.4,63.4 0 top
R65  68  [0402-RES]  47.4,64.9 0 top
R66  10K  [0402-RES]  28.8,51.3 270 top
R67  10K  [0402-RES]  50.9,67.9 0 top
R68  100R  [0402-RES]  42.9,49.4 270 top
R69  100R  [0402-RES]  44.9,49.4 270 top
R70  10K  [0402-RES]  31.8,74.9 270 top
R71  68R  [0402-RES]  46.4,49.4 270 top
R72  10K  [0402-RES]  50.4,41.9 0 top
R73  10K  [0402-RES]  50.4,46.9 0 top
R74  10K  [0402-RES]  50.4,51.9 0 top
R75  10K  [0402-RES]  50.4,56.9 0 top
R76  220R  [0402-RES]  47.4,66.4 0 top
R77  22R  [0402-RES]  72.3,70.4 270 top
R78  22R  [0402-RES]  70.8,70.4 270 top
R79  10K  [0402-RES]  75.3,70.4 270 top
R80  220R  [0402-RES]  74.8,61.9 0 top
R81  220R  [0402-RES]  74.8,63.4 0 top
R82  68  [0402-RES]  74.8,64.9 0 top
R83  10K  [0402-RES]  56.2,51.3 270 top
R84  10K  [0402-RES]  78.3,67.9 0 top
R85  100R  [0402-RES]  70.3,49.4 270 top
R86  100R  [0402-RES]  72.3,49.4 270 top
R87  10K  [0402-RES]  59.2,74.9 270 top
R88  68R  [0402-RES]  73.8,49.4 270 top
R89  10K  [0402-RES]  77.8,41.9 0 top
R90  10K  [0402-RES]  77.8,46.9 0 top
R91  10K  [0402-RES]  77.8,51.9 0 top
R92  10K  [0402-RES]  77.8,56.9 0 top
R93  220R  [0402-RES]  74.8,66.4 0 top
S1  RESET  [EVQP7J01K]  14.94,33.15 180 top
S2  RESET  [EVQP7J01K]  67.34,33.15 180 top
S3  RESET  [EVQP7J01K]  23.5,71.4 90 top
S4  RESET  [EVQP7J01K]  50.9,71.4 90 top
S5  RESET  [EVQP7J01K]  78.3,71.4 90 top
TP1  PAD.03  [PAD.03X.03]  37.19,21.95 0 bottom
TP2  PAD.03  [PAD.03X.03]  89.59,21.95 0 bottom
U1  STM32F205RGT6  [TQFP64]  24.77,20.32 45 top
U2  TXB0102  [TI-DCU]  11.68,24.13 0 top
U3  TXB0102  [TI-DCU]  8.59,24.13 0 top
U4  TXB0102  [TI-DCU]  8.59,18.95 0 top
U5  SN74LVC2T45  [TI-DCU]  8.64,13.67 0 top
U6  LD1117AS33  [SOT-223]  38.35,20.7 0 top
U7  MIC5207  [SOT23-5]  38.23,10.92 90 top
U8  128KB EEPROM  [MSOP-8]  15.88,3.81 0 top
U9  LIS331DLH  [LIS331DLH-MAN]  32.72,9.96 90 top
U10  BMP085  [BMP085]  21.01,3.33 90 top
U11  HMC5883L  [HMC5883L-MAN]  22.35,8.94 0 top
U12  L3G4200DH  [L3G4200DH-MAN]  31.09,4.06 270 top
U13  STM32F205RGT6  [TQFP64]  77.17,20.32 45 top
U14  SN74LVC2T45  [TI-DCU]  61.04,13.67 0 top
U15  LD1117AS33  [SOT-223]  90.75,20.7 0 top
U16  MIC5207  [SOT23-5]  90.63,10.92 90 top
U17  128KB EEPROM  [MSOP-8]  68.28,3.81 0 top
U18  BMP085  [BMP085]  73.41,3.33 90 top
U19  TXB0102  [TI-DCU]  60.99,24.13 0 top
U20  TXB0102  [TI-DCU]  64.08,24.13 0 top
U21  TXB0102  [TI-DCU]  60.99,18.95 0 top
U22  L3G4200DH  [L3G4200DH-MAN]  83.49,4.06 270 top
U23  LIS331DLH  [LIS331DLH-MAN]  85.12,9.96 90 top
U24  HMC5883L  [HMC5883L-MAN]  74.75,8.94 0 top
U25  LD1117AS33  [SOT-223]  5.95,45.4 0 top
U26  LD1117AS33  [SOT-223]  33.35,45.4 0 top
U27  LD1117AS33  [SOT-223]  60.75,45.4 0 top
U$1  MOUNT-HOLE2.1MM  [MOUNT-HOLE2.1]  39.5,2.5 0 top
U$2  MOUNT-HOLE2.1MM  [MOUNT-HOLE2.1]  9.5,32.5 0 top
U$3  MOUNT-HOLE2.1MM  [MOUNT-HOLE2.1]  9.5,2.5 0 top
U$4  MOUNT-HOLE2.1MM  [MOUNT-HOLE2.1]  39.5,32.5 0 top
U$5  MOUNT-HOLE2.1MM  [MOUNT-HOLE2.1]  91.9,32.5 0 top
U$6  MOUNT-HOLE2.1MM  [MOUNT-HOLE2.1]  61.9,2.5 0 top
U$7  MOUNT-HOLE2.1MM  [MOUNT-HOLE2.1]  91.9,2.5 0 top
U$8  MOUNT-HOLE2.1MM  [MOUNT-HOLE2.1]  61.9,32.5 0 top
U$9  MOUNT-HOLE2.1MM  [MOUNT-HOLE2.1]  23.5,75.9 90 top
U$10  MOUNT-HOLE2.1MM  [MOUNT-HOLE2.1]  1.5,75.9 90 top
U$11  MOUNT-HOLE2.1MM  [MOUNT-HOLE2.1]  1.5,38.9 90 top
U$12  MOUNT-HOLE2.1MM  [MOUNT-HOLE2.1]  23.5,38.9 90 top
U$13  LENSMOUNT_M12PTGREY  [LENSMOUNT_M12]  12.5,57.4 270 bottom
U$14  ADNS-2080  [ADNS-2080]  12.5,57.4 180 top
U$15  MOUNT-HOLE2.1MM  [MOUNT-HOLE2.1]  50.9,75.9 90 top
U$16  MOUNT-HOLE2.1MM  [MOUNT-HOLE2.1]  28.9,75.9 90 top
U$17  MOUNT-HOLE2.1MM  [MOUNT-HOLE2.1]  28.9,38.9 90 top
U$18  MOUNT-HOLE2.1MM  [MOUNT-HOLE2.1]  50.9,38.9 90 top
U$19  LENSMOUNT_M12PTGREY  [LENSMOUNT_M12]  39.9,57.4 270 bottom
U$20  ADNS-2080  [ADNS-2080]  39.9,57.4 180 top
U$21  MOUNT-HOLE2.1MM  [MOUNT-HOLE2.1]  78.3,75.9 90 top
U$22  MOUNT-HOLE2.1MM  [MOUNT-HOLE2.1]  56.3,75.9 90 top
U$23  MOUNT-HOLE2.1MM  [MOUNT-HOLE2.1]  56.3,38.9 90 top
U$24  MOUNT-HOLE2.1MM  [MOUNT-HOLE2.1]  78.3,38.9 90 top
U$25  LENSMOUNT_M12PTGREY  [LENSMOUNT_M12]  67.3,57.4 270 bottom
U$26  ADNS-2080  [ADNS-2080]  67.3,57.4 180 top
X1  8.000 KHz 5.0x3.2mm  [OSCILLATOR-5.0X3.2]  17.14,15.54 135 top
X2  8.000 KHz 5.0x3.2mm  [OSCILLATOR-5.0X3.2]  69.55,15.54 135 top
X3  [53261-05]  20.22,2.54 180 bottom
X4  [53261-05]  72.62,2.54 180 bottom
X5  8.000 KHz 5.0x3.2mm  [OSCILLATOR-5.0X3.2]  9.5,74.9 180 top
X6  53047-03  [53261-03]  16.5,74.9 0 bottom
X7  8.000 KHz 5.0x3.2mm  [OSCILLATOR-5.0X3.2]  36.9,74.9 180 top
X8  53047-03  [53261-03]  43.9,74.9 0 bottom
X9  8.000 KHz 5.0x3.2mm  [OSCILLATOR-5.0X3.2]  64.3,74.9 180 top
X10  53047-03  [53261-03]  71.3,74.9 0 bottom
X_EX1  HEADER_2X8  [HEADER_2MM_2X8]  12.5,41.7 0 bottom
X_EX2  HEADER_2X8  [HEADER_2MM_2X8]  39.9,41.7 0 bottom
X_EX3  HEADER_2X8  [HEADER_2MM_2X8]  67.3,41.7 0 bottom

## Library data of the parts
A1-A12 BOOT1-BOOT3 R5 R12 R16 R18 R21 R22 R27 R28 R31-R33 R42 R45 R49 R50 R53-R58 R62 R66 R67 R70-R75 R79 R83 R84 R87-R92 = pixhawk2; PARTNO: RMCF0402FT10K0
C1 C2 C5 C7-C10 C14 C15 C17-C22 C29 C32-C36 C40 C41 C44 C45 C47 C49-C52 C55 C57-C61 C64 C66-C70 C73 C75-C79 = pixhawk2; PARTNO: CC0402ZRY5V7BB104
C3 C4 C27 C28 C53 C54 C62 C63 C71 C72 = pixhawk2; PARTNO: CC0402JRNP09BN100
C6 C13 C38 C39 C56 C65 C74 = pixhawk2; PARTNO: F931A106MAA
C11 C12 C30 C31 = pixhawk2; PARTNO: C1608Y5V1C225Z
C16 C37 = pixhawk2; PARTNO: CC0402KRX7R9BB471
C23 C48 = pixhawk2; PARTNO: C1608Y5V0J475Z
C24 C46 = pixhawk2; PARTNO: C1005Y5V1C224Z
C25 C42 = pixhawk2; PARTNO: CC0402KRX7R7BB103
C26 C43 = pixhawk2; PARTNO: GRM155F51C474ZA01D
D1-D5 = pixhawk2; PARTNO: MSS1P4-M3/89A
F1 F2 = pixhawk2; PARTNO: MF-FSMF050X-2
F2A F2A1 = pixhawk2; PARTNO: MF-FSMF020X-2
F2B F2B1 = pixhawk2; DNP: T; PARTNO: MF-FSMF020X-2
IC1-IC3 = pixhawk2; PARTNO: STM32F102C6T6A
J1 J8 = pixhawk2; PARTNO: 53261-15
J2 J11 = pixhawk2; BOM: EXCLUDE; PARTNO: 953230-2000-AR-PR
J3 J10 = pixhawk2; PARTNO: 953230-2000-AR-PR
J4 J12 = pixhawk2; PARTNO: SM06B-SRSS-TB
J5 J7 J13 J16 J19 = pixhawk2; PARTNO: 47346-0001
J6 J9 J14 J17 J20 = pixhawk2; PARTNO: M50-3900542
J15 J18 J21 = pixhawk2; PARTNO: 53047-04
L1-L25 = pixhawk2; PARTNO: BKP1005HS121-T
LED1 LED4 LED7 LED12 LED17 = pixhawk2; PARTNO: LTST-C193KGKT-5A
LED2 LED5 LED8 LED13 LED18 = pixhawk2; PARTNO: LNJ437W84RA
LED3 LED6 LED9 LED11 LED14 LED16 LED19 LED21 = pixhawk2; PARTNO: LNJ937W8CRA
LED10 LED15 LED20 Q1-Q12 U11 U24 U$13 U$14 U$19 U$20 U$25 U$26 X3 X4 X_EX1-X_EX3 = pixhawk2
R1 R2 R19 R20 R35 R36 R40 R41 = pixhawk2; PARTNO: RMCF0402JT4K70
R3 R4 R24 R25 R51 R52 R68 R69 R85 R86 = pixhawk2; PARTNO: RMCF0402JT100R
R6 R8 R17 R23 R43 R44 R60 R61 R77 R78 = pixhawk2; PARTNO: RMCF0402JT22R0
R7 R9 R29 R30 = pixhawk2; PARTNO: RMCF0402ZT0R00
R10 R34 = pixhawk2; PARTNO: RMCF0402JT1K00
R11 R26 = pixhawk2; PARTNO: RC0402FR-0739K2L
R13 R15 R37 R38 R46 R47 R59 R63 R64 R76 R80 R81 R93 = pixhawk2; PARTNO: RMCF0402JT220R
R14 R39 R48 R65 R82 = pixhawk2; PARTNO: ERJ-2GEJ680X
S1-S5 = pixhawk2; PARTNO: EVQP7J01K
TP1 TP2 U$1-U$8 = pixhawk2; BOM: EXCLUDE; PARTNO: *
U1 U13 = pixhawk2; PARTNO: STM32F205
U2-U4 U19-U21 = pixhawk2; PARTNO: TXB0102DCUR
U5 U14 = pixhawk2; PARTNO: SN74LVC2T45
U6 U15 U25-U27 = pixhawk2; PARTNO: LD1117AS33
U7 U16 = pixhawk2; PARTNO: MIC5207-3.3YM5
U8 U17 = pixhawk2; PARTNO: 24FC128-I/MS
U9 U23 = pixhawk2; PARTNO: LIS331DLH
U10 U18 = pixhawk2; PARTNO: BMP0805
U12 U22 = pixhawk2; PARTNO: L3G4200DH
U$9-U$12 U$15-U$18 U$21-U$24 = pixhawk2; BOM: EXCLUDE
X1 X2 = pixhawk2; PARTNO: 7M-16.000MEEQ-T
X5 X7 X9 = pixhawk2; PARTNO: ABM3B-8.000MHZ-10-1-U-T
X6 X8 X10 = pixhawk2; PARTNO: 53047-03

## Nets
!JTRST: J6.10 U1.56
!JTRST1: J9.10 U13.56
ACCEL_CS: U1.4 U9.8
ACCEL_CS1: U13.4 U23.8
ADC123_IN1: C29.1 R26.1 R27.2 U13.8
ADC123_IN2: J10.28 J11.28 U13.9
ADC123_IN3: J10.29 J11.29 U13.10
ADC123_IN4: J10.30 J11.30 U13.11
ADC123_IN10: C5.1 R11.1 R12.2 U1.8
ADC123_IN11: J2.28 J3.28 U1.9
ADC123_IN12: J2.29 J3.29 U1.10
ADC123_IN13: J2.30 J3.30 U1.11
ADC_IN1: IC2.19 X_EX1.2
ADC_IN2: IC2.18 X_EX1.1
ADC_IN3: IC1.19 X_EX2.2
ADC_IN4: IC1.18 X_EX2.1
ADC_IN5: IC3.19 X_EX3.2
ADC_IN6: IC3.18 X_EX3.1
ADR_1: A1.2 IC1.25
ADR_2: A2.2 IC1.26
ADR_3: A3.2 IC1.27
ADR_4: A5.2 IC2.25
ADR_5: A6.2 IC2.26
ADR_6: A7.2 IC2.27
ADR_7: A9.2 IC3.25
ADR_8: A10.2 IC3.26
ADR_9: A11.2 IC3.27
ARD_1: A8.2 IC2.28
ARD_2: A4.2 IC1.28
ARD_3: A12.2 IC3.28
BOOT0: R18.2 TP1.P$1 U1.60
BOOT1: R31.2 TP2.P$1 U13.60
BOOT2: BOOT1.1 IC2.44 R49.2
BOOT3: IC2.20 R53.2
BOOT4: BOOT2.1 IC1.44 R66.2
BOOT5: IC1.20 R70.2
BOOT6: BOOT3.1 IC3.44 R83.2
BOOT7: IC3.20 R87.2
CAN2_RX: J2.6 J3.6 U1.33
CAN2_RX1: J10.6 J11.6 U13.33
CAN2_TX: J2.5 J3.5 U1.34
CAN2_TX1: J10.5 J11.5 U13.34
GND [power]: C1.2 C2.2 C3.2 C4.1 C5.2 C6.C C7.2 C8.2 C9.2 C10.2 C11.2 C12.2 C13.C C14.2 C15.2 C16.2 C17.1 C18.2 C19.2 C20.2 C21.2 C22.2 C23.2 C25.2 J1.15 J2.3 J2.4 J2.27 J3.3 J3.4 J3.27 J4.1 J4.5 J5.5 J5.GND1 J5.GND2 J5.GND3 J5.GND4 J6.3 J6.5 J6.9 R5.2 R12.1 R13.1 R18.1 R21.1 S1.B3 U1.12 U1.18 U1.63 U2.2 U3.2 U4.2 U5.4 U6.1 U7.2 U8.1 U8.2 U8.3 U8.4 U9.5 U9.10 U9.12 U9.13 U9.16 U10.1 U11.9 U11.11 U12.8 U12.9 U12.10 U12.11 U12.12 U12.13 X1.2 X1.4 X3.5
GND1 [power]: C27.2 C28.1 C29.2 C30.2 C31.2 C32.2 C33.2 C34.2 C35.2 C36.2 C37.2 C38.C C39.C C40.2 C41.1 C42.2 C44.2 C45.2 C47.2 C48.2 C49.2 C50.2 C51.2 C52.2 J7.5 J7.GND1 J7.GND2 J7.GND3 J7.GND4 J8.15 J9.3 J9.5 J9.9 J10.3 J10.4 J10.27 J11.3 J11.4 J11.27 J12.1 J12.5 R27.1 R28.2 R31.1 R33.1 R37.1 S2.B3 U13.12 U13.18 U13.63 U14.4 U15.1 U16.2 U17.1 U17.2 U17.3 U17.4 U18.1 U19.2 U20.2 U21.2 U22.8 U22.9 U22.10 U22.11 U22.12 U22.13 U23.5 U23.10 U23.12 U23.13 U23.16 U24.9 U24.11 X2.2 X2.4 X4.5
GND2 [power]: A5.1 A6.1 A7.1 A8.1 C53.2 C54.1 C55.2 C56.C C57.2 C58.2 C59.2 C60.2 C61.1 IC2.8 IC2.23 IC2.35 IC2.47 J13.5 J13.GND1 J13.GND2 J13.GND3 J13.GND4 J14.3 J14.5 J14.9 J15.4 Q5.2 Q6.2 Q7.2 Q8.2 R46.1 R49.1 R53.1 R55.2 R56.2 R57.2 R58.2 S3.B3 U25.1 U$14.6 X5.2 X5.4 X6.3 X_EX1.4 X_EX1.7
GND4 [power]: A1.1 A2.1 A3.1 A4.1 C62.2 C63.1 C64.2 C65.C C66.2 C67.2 C68.2 C69.2 C70.1 IC1.8 IC1.23 IC1.35 IC1.47 J16.5 J16.GND1 J16.GND2 J16.GND3 J16.GND4 J17.3 J17.5 J17.9 J18.4 Q1.2 Q2.2 Q3.2 Q4.2 R63.1 R66.1 R70.1 R72.2 R73.2 R74.2 R75.2 S4.B3 U26.1 U$20.6 X7.2 X7.4 X8.3 X_EX2.4 X_EX2.7
GND6 [power]: A9.1 A10.1 A11.1 A12.1 C71.2 C72.1 C73.2 C74.C C75.2 C76.2 C77.2 C78.2 C79.1 IC3.8 IC3.23 IC3.35 IC3.47 J19.5 J19.GND1 J19.GND2 J19.GND3 J19.GND4 J20.3 J20.5 J20.9 J21.4 Q9.2 Q10.2 Q11.2 Q12.2 R80.1 R83.1 R87.1 R89.2 R90.2 R91.2 R92.2 S5.B3 U27.1 U$26.6 X9.2 X9.4 X10.3 X_EX3.4 X_EX3.7
GPIO1: U1.24 U5.2
GPIO2: U1.25 U5.3
GPIO3: U13.24 U14.2
GPIO4: U13.25 U14.3
GPIO_DIR: U1.2 U5.5
GPIO_DIR1: U13.2 U14.5
GPIO_EXT1: J1.13 J2.24 J3.24 U5.7
GPIO_EXT2: J1.12 J2.25 J3.25 U5.6
GPIO_EXT3: J8.13 J10.24 J11.24 U14.7
GPIO_EXT4: J8.12 J10.25 J11.25 U14.6
GYRO_CS: U1.3 U12.5
GYRO_CS1: U13.3 U22.5
I2C1_SCL: R3.1 U1.61
I2C1_SCL1: R25.1 U13.61
I2C1_SCL_EXT: L6.1 R1.1 R3.2
I2C1_SCL_EXT1: L19.1 R25.2 R36.1
I2C1_SDA: R4.1 U1.62
I2C1_SDA1: R24.1 U13.62
I2C2_SCL: J2.17 J3.17 R20.1 U1.29 U8.6 U10.6 U11.1 X3.2
I2C2_SCL1: J10.17 J11.17 R41.1 U13.29 U17.6 U18.6 U24.1 X4.2
I2C2_SDA: J2.18 J3.18 R19.1 U1.30 U8.5 U10.7 U11.16 X3.3
I2C2_SDA1: J10.18 J11.18 R40.1 U13.30 U17.5 U18.7 U24.16 X4.3
I2C2_SDA_EXT: L7.1 R2.1 R4.2
I2C2_SDA_EXT1: L20.1 R24.2 R35.1
I2C3_SCL: J2.9 J3.9 U1.41
I2C3_SCL1: J10.9 J11.9 U13.41
I2C3_SDA: J2.10 J3.10 U1.40
I2C3_SDA1: J10.10 J11.10 U13.40
I2C_SCL1: IC2.42 R51.1
I2C_SCL2: IC1.42 R68.1
I2C_SCL3: IC3.42 R85.1
I2C_SDA1: IC2.43 R52.1
I2C_SDA2: IC1.43 R69.1
I2C_SDA3: IC3.43 R86.1
JNTRST1: IC2.40 J14.10
JNTRST2: IC1.40 J17.10
JNTRST3: IC3.40 J20.10
JTCK-SWCLK: J6.4 U1.49
JTCK-SWCLK1: J9.4 U13.49
JTCK-SWCLK2: IC2.37 J14.4
JTCK-SWCLK3: IC1.37 J17.4
JTCK-SWCLK4: IC3.37 J20.4
JTDI: J6.8 U1.50
JTDI1: J9.8 U13.50
JTDI2: IC2.38 J14.8
JTDI3: IC1.38 J17.8
JTDI4: IC3.38 J20.8
JTDO: J6.6 U1.55
JTDO1: J9.6 U13.55
JTDO2: IC2.39 J14.6
JTDO3: IC1.39 J17.6
JTDO4: IC3.39 J20.6
JTMS-SWDIO: J6.2 U1.46
JTMS-SWDIO1: J9.2 U13.46
JTMS-SWDIO2: IC2.34 J14.2
JTMS-SWDIO3: IC1.34 J17.2
JTMS-SWDIO4: IC3.34 J20.2
LED1: LED15.K U$20.2
LED2: Q1.3 X_EX2.10
LED3: Q2.3 X_EX2.12
LED4: Q3.3 X_EX2.14
LED5: LED10.K U$14.2
LED6: Q5.3 X_EX1.10
LED7: Q6.3 X_EX1.12
LED8: Q7.3 X_EX1.14
LED9: Q8.3 X_EX1.16
LED10: Q4.3 X_EX2.16
LED11: LED20.K U$26.2
LED12: Q9.3 X_EX3.10
LED13: Q10.3 X_EX3.12
LED14: Q11.3 X_EX3.14
LED15: Q12.3 X_EX3.16
LED_AMBER: R14.1 U1.35
LED_AMBER1: R39.1 U13.35
LED_AMBER2: IC2.3 R48.1
LED_AMBER3: IC1.3 R65.1
LED_AMBER4: IC3.3 R82.1
LED_BLUE: R15.1 U1.36
LED_BLUE1: R38.1 U13.36
LED_BLUE2: IC2.2 R47.1
LED_BLUE3: IC1.2 R64.1
LED_BLUE4: IC3.2 R81.1
LED_RED1: IC2.4 R59.1
LED_RED2: IC1.4 R76.1
LED_RED3: IC3.4 R93.1
MAG_DRDY: U1.27 U11.15 X3.4
MAG_DRDY1: U13.27 U24.15 X4.4
MOTION1: IC2.14 U$14.3
MOTION2: IC1.14 U$20.3
MOTION3: IC3.14 U$26.3
N$1: C4.2 U1.6 X1.1
N$2: C3.1 U1.5 X1.3
N$3: J1.2 L2.2
N$4: C11.1 U1.31
N$5: F2A.2 F2B.2 L3.1
N$6: C12.1 U1.47
N$7: J5.2 R6.1
N$8: J5.3 R8.1
N$9: C16.1 U7.4
N$10: C24.1 U11.8
N$11 [power]: C1.1 R7.2 R9.2 U2.7 U3.7
N$12: J1.6 U2.8
N$13: J1.7 U2.1
N$14 [power]: J1.1 L1.2
N$15: J1.5 U3.8
N$16: J1.8 U3.1
N$17: C24.2 U11.12
N$18: C28.2 U13.6 X2.1
N$19: J1.3 L6.2
N$20: C27.1 U13.5 X2.3
N$21: J4.3 L4.2
N$22: C17.2 R16.1 S1.A1 U1.7
N$23 [power]: D1.ANODE L8.1
N$24 [power]: J4.2 L3.2
N$25: J4.4 L5.2
N$26: J1.4 L7.2
N$27 [power]: F1.2 L2.1
N$28: LED3.C R15.2
N$29: LED1.C R13.2
N$30: LED2.C R14.2
N$31: L9.1 R10.2
N$32: J1.11 L9.2
N$33: C26.2 R21.2
N$34: C25.1 C26.1 U12.14
N$35: L10.1 R11.2
N$36: C23.1 U11.10
N$37: J1.14 L10.2
N$38: J7.2 R17.1
N$39: J7.3 R23.1
N$40 [power]: D2.ANODE L12.1
N$41 [power]: J12.2 L13.2
N$42 [power]: F2.2 L14.1
N$43 [power]: C51.1 R29.2 R30.2 U19.7 U20.7
N$44: C31.1 U13.47
N$45: C30.1 U13.31
N$46: C37.1 U16.4
N$47: C41.2 R32.1 S2.A1 U13.7
N$48: C43.2 R33.2
N$49: C42.1 C43.1 U22.14
N$50: C48.1 U24.10
N$51 [power]: C36.1 L15.2 U16.1 U16.3
N$52: LED6.C R38.2
N$53: LED5.C R39.2
N$54: J12.3 L17.2
N$55: J12.4 L18.2
N$56: LED4.C R37.2
N$57 [power]: J8.1 L16.2
N$58: J8.2 L14.2
N$59: J8.6 U20.8
N$60: J8.7 U20.1
N$61: J8.5 U19.8
N$62: J8.8 U19.1
N$63: J8.3 L19.2
N$64: J8.4 L20.2
N$65: L21.1 R34.2
N$66: J8.11 L21.2
N$67: L22.1 R26.2
N$68: J8.14 L22.2
N$69: F2A1.2 F2B1.2 L13.1
N$70: C46.1 U24.8
N$71: C46.2 U24.12
N$72: J13.2 R43.1
N$73: J13.3 R44.1
N$74 [power]: D3.ANODE L23.1
N$75: C54.2 IC2.6 X5.1
N$76: C53.1 IC2.5 X5.3
N$77: LED9.C R47.2
N$78: LED8.C R48.2
N$79: LED7.C R46.2
N$80: C61.2 IC2.7 R50.1 S3.A1
N$81: J15.2 R51.2
N$82: J15.3 R52.2
N$83: LED10.A R54.2
N$84: LED11.C R59.2
N$85: J16.2 R60.1
N$86: J16.3 R61.1
N$87 [power]: D4.ANODE L24.1
N$88: C63.2 IC1.6 X7.1
N$89: C62.1 IC1.5 X7.3
N$90: LED14.C R64.2
N$91: LED13.C R65.2
N$92: LED12.C R63.2
N$93: C70.2 IC1.7 R67.1 S4.A1
N$94: J18.2 R68.2
N$95: J18.3 R69.2
N$96: LED15.A R71.2
N$97: LED16.C R76.2
N$98: J19.2 R77.1
N$99: J19.3 R78.1
N$100 [power]: C14.1 L11.2 U7.1 U7.3
N$101 [power]: D5.ANODE L25.1
N$102: C72.2 IC3.6 X9.1
N$103: C71.1 IC3.5 X9.3
N$104: LED19.C R81.2
N$105: LED18.C R82.2
N$106: LED17.C R80.2
N$107: C79.2 IC3.7 R84.1 S5.A1
N$108: J21.2 R85.2
N$109: J21.3 R86.2
N$110: LED20.A R88.2
N$111: LED21.C R93.2
OTG_FS_DM: R6.2 U1.44
OTG_FS_DM1: R17.2 U13.44
OTG_FS_DP: R8.2 U1.45
OTG_FS_DP1: R23.2 U13.45
PB1: IC2.21 X_EX1.13
PB2: IC2.22 X_EX1.15
PB2-BOOT1: R5.1 U1.28
PB2-BOOT2: R28.1 U13.28
PB3: IC2.46 X_EX1.11
PB4: IC2.45 X_EX1.9
PB5: IC1.21 X_EX2.13
PB6: IC1.22 X_EX2.15
PB7: IC1.46 X_EX2.11
PB8: IC1.45 X_EX2.9
PB9: IC3.21 X_EX3.13
PB10: IC3.22 X_EX3.15
PB11: IC3.46 X_EX3.11
PB12: IC3.45 X_EX3.9
PC1: J10.26 J11.26 U13.39
PC8: J2.26 J3.26 U1.39
PPM_INPUT: J2.23 J3.23 R10.1 U1.26
PPM_INPUT1: J10.23 J11.23 R34.1 U13.26
PRES_DRDY: U1.43 U10.2
PRES_DRDY1: U13.43 U18.2
SPI1_MISO: U1.22 U9.7 U12.4
SPI1_MISO1: U13.22 U22.4 U23.7
SPI1_MOSI: U1.23 U9.6 U12.3
SPI1_MOSI1: U13.23 U22.3 U23.6
SPI1_SCK: U1.21 U9.4 U12.2
SPI1_SCK1: U13.21 U22.2 U23.4
SPI3_MISO: J2.13 J3.13 U1.52
SPI3_MISO1: J10.13 J11.13 U13.52
SPI3_MOSI: J2.12 J3.12 U1.57
SPI3_MOSI1: J10.12 J11.12 U13.57
SPI3_NSS: J2.14 J3.14 U1.20
SPI3_NSS1: J10.14 J11.14 U13.20
SPI3_SCK: J2.11 J3.11 U1.51
SPI3_SCK1: J10.11 J11.11 U13.51
SPI_MISO1: IC2.16 X_EX1.3
SPI_MISO2: IC1.16 X_EX2.3
SPI_MISO3: IC3.16 X_EX3.3
SPI_MOSI1: IC2.17 U$14.1
SPI_MOSI2: IC1.17 U$20.1
SPI_MOSI3: IC3.17 U$26.1
SPI_SCK1: IC2.15 U$14.5
SPI_SCK2: IC1.15 U$20.5
SPI_SCK3: IC3.15 U$26.5
TIM2_CH1: IC2.13 Q8.1 R58.1
TIM2_CH1_ETR1: IC2.10 Q5.1 R55.1
TIM2_CH1_ETR2: IC1.10 Q1.1 R72.1
TIM2_CH1_ETR3: IC3.10 Q9.1 R89.1
TIM2_CH2: IC1.13 Q4.1 R75.1
TIM2_CH3: IC1.11 Q2.1 R73.1
TIM2_CH4: IC1.12 Q3.1 R74.1
TIM2_CH5: IC2.11 Q6.1 R56.1
TIM2_CH6: IC2.12 Q7.1 R57.1
TIM2_CH7: IC3.13 Q12.1 R92.1
TIM2_CH8: IC3.11 Q10.1 R90.1
TIM2_CH9: IC3.12 Q11.1 R91.1
TIM3_CH1: IC2.41 X_EX1.5
TIM3_CH2: IC1.41 X_EX2.5
TIM3_CH3: IC3.41 X_EX3.5
UART5_RX: J2.16 J3.16 U1.54
UART5_RX1: J10.16 J11.16 U13.54
UART5_TX: J2.15 J3.15 U1.53
UART5_TX1: J10.15 J11.15 U13.53
USART1_RX: U1.59 U4.4
USART1_RX1: U13.59 U21.4
USART1_RX2: IC2.31 X6.2
USART1_RX3: IC1.31 X8.2
USART1_RX4: IC3.31 X10.2
USART1_RX_EXT: J1.10 J2.8 J3.8 U4.1
USART1_RX_EXT1: J8.10 J10.8 J11.8 U21.1
USART1_TX: U1.58 U4.5
USART1_TX1: U13.58 U21.5
USART1_TX2: IC2.30 X6.1
USART1_TX3: IC1.30 X8.1
USART1_TX4: IC3.30 X10.1
USART1_TX_EXT: J1.9 J2.7 J3.7 U4.8
USART1_TX_EXT1: J8.9 J10.7 J11.7 U21.8
USART2_CTS: J2.19 J3.19 U1.14 U2.5
USART2_CTS1: J10.19 J11.19 U13.14 U20.5
USART2_RTS: J2.20 J3.20 U1.15 U2.4
USART2_RTS1: J10.20 J11.20 U13.15 U20.4
USART2_RX: J2.22 J3.22 U1.17 U3.4
USART2_RX1: J10.22 J11.22 U13.17 U19.4
USART2_TX: J2.21 J3.21 U1.16 U3.5
USART2_TX1: J10.21 J11.21 U13.16 U19.5
USART6_RX: L4.1 U1.38
USART6_RX1: L17.1 U13.38
USART6_TX: L5.1 U1.37
USART6_TX1: L18.1 U13.37
USBDM1: IC2.32 R43.2
USBDM2: IC1.32 R60.2
USBDM3: IC3.32 R77.2
USBDP1: IC2.33 R44.2
USBDP2: IC1.33 R61.2
USBDP3: IC3.33 R78.2
VBUS [power]: J5.1 L8.2 R22.1
VBUS1 [power]: J7.1 L12.2 R42.1
VBUS2 [power]: J13.1 L23.2 R45.1
VBUS3 [power]: J16.1 L24.2 R62.1
VBUS4 [power]: J19.1 L25.2 R79.1
VBUS_DETECT: R22.2 U1.42
VBUS_DETECT1: R42.2 U13.42
VBUS_DETECT2: IC2.29 R45.2
VBUS_DETECT3: IC1.29 R62.2
VBUS_DETECT4: IC3.29 R79.2
VDD_3V1 [power]: C33.1 C34.1 C35.1 C38.A C49.1 C52.1 F2.1 F2B1.1 J9.1 LED4.A LED5.A LED6.A R29.1 R32.2 R40.2 R41.2 U13.1 U13.19 U13.32 U13.48 U13.64 U14.1 U15.2 U15.4 U17.8 U18.4 U19.3 U19.6 U20.3 U20.6 U21.3 U21.6 U21.7 U22.1 U23.1
VDD_3V2 [power]: BOOT1.2 C56.A C57.1 C58.1 C59.1 C60.1 IC2.1 IC2.9 IC2.24 IC2.36 IC2.48 J14.1 LED7.A LED8.A LED9.A LED11.A R50.2 R54.1 U25.2 U25.4 U$14.4 U$14.8 X_EX1.6
VDD_3V3 [power]: C2.1 C6.A C8.1 C9.1 C10.1 C20.1 F1.1 F2B.1 J6.1 LED1.A LED2.A LED3.A R9.1 R16.2 R19.2 R20.2 U1.1 U1.19 U1.32 U1.48 U1.64 U2.3 U2.6 U3.3 U3.6 U4.3 U4.6 U4.7 U5.1 U6.2 U6.4 U8.8 U9.1 U10.4 U12.1
VDD_3V3_ANALOG [power]: C13.A C15.1 C18.1 C19.1 C21.1 C22.1 U1.13 U7.5 U9.14 U9.15 U10.3 U11.2 U11.4 U11.13 U12.15 U12.16 X3.1
VDD_3V3_ANALOG1 [power]: C39.A C40.1 C44.1 C45.1 C47.1 C50.1 U13.13 U16.5 U18.3 U22.15 U22.16 U23.14 U23.15 U24.2 U24.4 U24.13 X4.1
VDD_3V4 [power]: BOOT2.2 C65.A C66.1 C67.1 C68.1 C69.1 IC1.1 IC1.9 IC1.24 IC1.36 IC1.48 J17.1 LED12.A LED13.A LED14.A LED16.A R67.2 R71.1 U26.2 U26.4 U$20.4 U$20.8 X_EX2.6
VDD_3V5 [power]: BOOT3.2 C74.A C75.1 C76.1 C77.1 C78.1 IC3.1 IC3.9 IC3.24 IC3.36 IC3.48 J20.1 LED17.A LED18.A LED19.A LED21.A R84.2 R88.1 U27.2 U27.4 U$26.4 U$26.8 X_EX3.6
VDD_5V [power]: C7.1 D1.CATHODE F2A.1 J2.1 J2.2 J3.1 J3.2 L1.1 L11.1 R1.2 R2.2 R7.1 U5.8 U6.3
VDD_5V1 [power]: C32.1 D2.CATHODE F2A1.1 J10.1 J10.2 J11.1 J11.2 L15.1 L16.1 R30.1 R35.2 R36.2 U14.8 U15.3
VDD_5V2 [power]: C55.1 D3.CATHODE J15.1 U25.3 X_EX1.8
VDD_5V3 [power]: C64.1 D4.CATHODE J18.1 U26.3 X_EX2.8
VDD_5V4 [power]: C73.1 D5.CATHODE J21.1 U27.3 X_EX3.8

## Tracks (layer width: path | path; a pad name or v marks a point on that pad's centre or on a via)
!JTRST  (via drill 0.3)
  Top 0.203: U1.56 20.32,25.12 v20.32,26.82
  Route2 0.203: v20.32,26.82 19.71,27.43 19.71,30.28 18.36,31.62 J6.10
!JTRST1  (via drill 0.3)
  Top 0.203: U13.56 72.72,25.12 v72.72,26.82
  Route2 0.203: v72.72,26.82 72.11,27.43 72.11,30.28 70.76,31.62 J9.10
ACCEL_CS  (via drill 0.3)
  Top 0.203: U1.4 19.65,18.39 20.22,18.39 v20.32,18.29 | v34.54,11.38 34.54,10.86 U9.8
  Bottom 0.203: v20.32,18.29 21.95,18.29 22.15,18.09 22.15,15.04 26.42,10.77 33.93,10.77 v34.54,11.38
ACCEL_CS1  (via drill 0.3)
  Top 0.203: U13.4 72.05,18.39 72.62,18.39 v72.72,18.29 | v86.94,11.38 86.94,10.86 U23.8
  Bottom 0.203: v72.72,18.29 74.35,18.29 74.55,18.09 74.55,15.04 78.82,10.77 86.33,10.77 v86.94,11.38
ADC123_IN1  (via drill 0.3)
  Top 0.203: v73.94,17.68 73.94,17.45 U13.8 | R26.1 63.93,8.24 C29.1 R27.2 66.6,12.27 v66.83,12.5
  Bottom 0.203: v66.83,12.5 68.76,12.5 v73.94,17.68
ADC123_IN2  (via drill 0.3, 0.3 pad 0.51)
  Top 0.203: v76.07,17.88 75.08,17.88 U13.9 | J11.28 95.7,5.49 v94.06,5.49
  Route2 0.203: v89.59,13.01 90.6,11.99 90.6,7.01 91.21,6.4 v91.21,6.1
  Bottom 0.203: v76.07,17.88 76.38,17.88 81.25,13.01 v89.59,13.01 | J11.28 95.7,5.49 v94.06,5.49 93.04,6.5 91.52,6.5 91.21,6.2 v91.21,6.1
ADC123_IN3  (via drill 0.3, 0.3 pad 0.51)
  Top 0.203: v75.56,17.17 75.08,17.17 U13.10 | J11.29 100.97,3.45 v99.34,3.45
  Route2 0.203: v90.81,12.8 91.21,12.39 91.21,7.32 92.02,6.5 v92.02,5.59
  Bottom 0.203: v75.56,17.17 76.48,17.17 81.05,12.6 88.98,12.6 89.18,12.39 90.4,12.39 v90.81,12.8 | J11.29 100.97,3.45 v99.34,3.45 98.32,4.47 94.16,4.47 92.84,5.79 92.23,5.79 v92.02,5.59
ADC123_IN4  (via drill 0.3, 0.3 pad 0.51)
  Top 0.203: v76.07,16.46 75.07,16.46 U13.11 | J11.30 97.25,3.51 v97.31,3.45
  Route2 0.203: v91.82,12.8 91.82,7.62 92.84,6.6 v92.84,4.88
  Bottom 0.203: v76.07,16.46 76.58,16.46 80.85,12.19 88.77,12.19 88.98,11.99 91.01,11.99 v91.82,12.8 | v92.84,4.88 94.26,3.45 95.67,3.45 J11.30 95.77,3.45 v97.31,3.45
ADC123_IN10  (via drill 0.3)
  Top 0.203: v21.54,17.68 21.54,17.45 U1.8 | R11.1 11.53,8.24 C5.1 R12.2 14.2,12.27 v14.43,12.5
  Bottom 0.203: v14.43,12.5 16.36,12.5 v21.54,17.68
ADC123_IN11  (via drill 0.3, 0.3 pad 0.51)
  Top 0.203: v23.67,17.88 22.68,17.88 U1.9 | J2.28 43.3,5.49 v41.66,5.49
  Route2 0.203: v37.19,13.01 38.2,11.99 38.2,7.01 38.81,6.4 v38.81,6.1
  Bottom 0.203: v23.67,17.88 23.98,17.88 28.85,13.01 v37.19,13.01 | J2.28 43.3,5.49 v41.66,5.49 40.64,6.5 39.12,6.5 38.81,6.2 v38.81,6.1
ADC123_IN12  (via drill 0.3, 0.3 pad 0.51)
  Top 0.203: v23.16,17.17 22.68,17.17 U1.10 | J2.29 48.58,3.45 v46.94,3.45
  Route2 0.203: v38.41,12.8 38.81,12.39 38.81,7.32 39.62,6.5 v39.62,5.59
  Bottom 0.203: v23.16,17.17 24.08,17.17 28.65,12.6 36.58,12.6 36.78,12.39 38,12.39 v38.41,12.8 | J2.29 48.58,3.45 v46.94,3.45 45.92,4.47 41.76,4.47 40.44,5.79 39.83,5.79 v39.62,5.59
ADC123_IN13  (via drill 0.3, 0.3 pad 0.51)
  Top 0.203: v23.67,16.46 22.67,16.46 U1.11 | J2.30 44.85,3.51 v44.91,3.45
  Route2 0.203: v39.42,12.8 39.42,7.62 40.44,6.6 v40.44,4.88
  Bottom 0.203: v23.67,16.46 24.18,16.46 28.45,12.19 36.37,12.19 36.58,11.99 38.61,11.99 v39.42,12.8 | v40.44,4.88 41.86,3.45 43.27,3.45 J2.30 43.37,3.45 v44.91,3.45
ADC_IN1  (via drill 0.3)
  Top 0.2: IC2.19 4.95,70.65 5.4,70.2 5.4,69.3 5,68.9 5,66.2 5.3,65.9 5.3,64.4 v5.2,64.3
  Bottom 0.2: v5.2,64.3 4.7,63.7 4.7,48.8 5.5,48 X_EX1.2
ADC_IN2  (via drill 0.3)
  Top 0.2: IC2.18 5.45,70.75 5.8,70.4 5.8,69 5.4,68.6 5.4,66.5 6,65.9 v6,65.1
  Bottom 0.2: v6,65.1 6,61.2 5.1,60.3 5.1,49.1 6.5,47.7 6.5,42.5 5.9,41.9 4.4,41.9 3.8,41.3 3.8,39.6 4.92,38.48 X_EX1.1
ADC_IN3  (via drill 0.3)
  Top 0.2: IC1.19 32.35,70.65 32.8,70.2 32.8,69.3 32.4,68.9 32.4,66.2 32.7,65.9 32.7,64.4 v32.6,64.3
  Bottom 0.2: v32.6,64.3 32.1,63.7 32.1,48.8 32.9,48 X_EX2.2
ADC_IN4  (via drill 0.3)
  Top 0.2: IC1.18 32.85,70.75 33.2,70.4 33.2,69 32.8,68.6 32.8,66.5 33.4,65.9 v33.4,65.1
  Bottom 0.2: v33.4,65.1 33.4,61.2 32.5,60.3 32.5,49.1 33.9,47.7 33.9,42.5 33.3,41.9 31.8,41.9 31.2,41.3 31.2,39.6 32.33,38.48 X_EX2.1
ADC_IN5  (via drill 0.3)
  Top 0.2: IC3.19 59.75,70.65 60.2,70.2 60.2,69.3 59.8,68.9 59.8,66.2 60.1,65.9 60.1,64.4 v60,64.3
  Bottom 0.2: v60,64.3 59.5,63.7 59.5,48.8 60.3,48 X_EX3.2
ADC_IN6  (via drill 0.3)
  Top 0.2: IC3.18 60.25,70.75 60.6,70.4 60.6,69 60.2,68.6 60.2,66.5 60.8,65.9 v60.8,65.1
  Bottom 0.2: v60.8,65.1 60.8,61.2 59.9,60.3 59.9,49.1 61.3,47.7 61.3,42.5 60.7,41.9 59.2,41.9 58.6,41.3 58.6,39.6 59.73,38.48 X_EX3.1
ADR_1  (via drill 0.3)
  Top 0.2: v30.2,70.8 29.8,70.8 29.6,71 28.5,71 28.2,70.7 28.2,70.25 IC1.25
  Bottom 0.2: v30.2,70.8 29.8,71.2 29.8,71.7 29.1,72.4 A1.2
ADR_2  (via drill 0.3)
  Top 0.2: IC1.26 28.65,69.65 v29.3,70.3
  Bottom 0.2: 29.2,70.6 29.2,70.8 A2.2 | 29.2,70.6 29.2,70.4 | 29.2,70.6 29.1,70.7 29.1,70.5 v29.3,70.3
ADR_3  (via drill 0.3)
  Top 0.2: IC1.27 29.25,69.15 v29.4,69.3
  Bottom 0.2: A3.2 29.2,68.9 29.2,69.1 v29.4,69.3
ADR_4  (via drill 0.3)
  Top 0.2: v2.8,70.8 2.4,70.8 2.2,71 1.1,71 0.8,70.7 0.8,70.25 IC2.25
  Bottom 0.2: v2.8,70.8 2.4,71.2 2.4,71.7 1.7,72.4 A5.2
ADR_5  (via drill 0.3)
  Top 0.2: IC2.26 1.25,69.65 v1.9,70.3
  Bottom 0.2: 1.8,70.6 1.8,70.8 A6.2 | 1.8,70.6 1.8,70.4 | 1.8,70.6 1.7,70.7 1.7,70.5 v1.9,70.3
ADR_6  (via drill 0.3)
  Top 0.2: IC2.27 1.85,69.15 v2,69.3
  Bottom 0.2: A7.2 1.8,68.9 1.8,69.1 v2,69.3
ADR_7  (via drill 0.3)
  Top 0.2: v57.6,70.8 57.2,70.8 57,71 55.9,71 55.6,70.7 55.6,70.25 IC3.25
  Bottom 0.2: v57.6,70.8 57.2,71.2 57.2,71.7 56.5,72.4 A9.2
ADR_8  (via drill 0.3)
  Top 0.2: IC3.26 56.05,69.65 v56.7,70.3
  Bottom 0.2: 56.6,70.6 56.6,70.8 A10.2 | 56.6,70.6 56.6,70.4 | 56.6,70.6 56.5,70.7 56.5,70.5 v56.7,70.3
ADR_9  (via drill 0.3)
  Top 0.2: IC3.27 56.65,69.15 v56.8,69.3
  Bottom 0.2: A11.2 56.6,68.9 56.6,69.1 v56.8,69.3
ARD_1  (via drill 0.3)
  Top 0.2: v2.9,68.9 2.6,68.6 1.6,68.6 1.55,68.65 IC2.28
  Bottom 0.2: A8.2 1.7,67.3 2.5,68.1 2.5,68.5 v2.9,68.9
ARD_2  (via drill 0.3)
  Top 0.2: v30.3,68.9 30,68.6 29,68.6 28.95,68.65 IC1.28
  Bottom 0.2: A4.2 29.1,67.3 29.9,68.1 29.9,68.5 v30.3,68.9
ARD_3  (via drill 0.3)
  Top 0.2: v57.7,68.9 57.4,68.6 56.4,68.6 56.35,68.65 IC3.28
  Bottom 0.2: A12.2 56.5,67.3 57.3,68.1 57.3,68.5 v57.7,68.9
BOOT0  (via drill 0.3)
  Top 0.203: R18.2 34.33,20.72 v35.26,21.64 | v18.9,24.89 18.9,23.71 U1.60
  Bottom 0.203: 35.41,21.49 35.26,21.34 29.87,21.34 27.84,23.37 24.18,23.37 23.77,22.96 22.05,22.96 20.12,24.89 v18.9,24.89 | 35.41,21.49 35.87,21.95 TP1.P$1 | 35.41,21.49 v35.26,21.64
BOOT1  (via drill 0.3)
  Top 0.203: R31.2 86.73,20.72 v87.66,21.64 | v71.3,24.89 71.3,23.71 U13.60
  Bottom 0.203: 87.81,21.49 87.66,21.34 82.27,21.34 80.24,23.37 76.58,23.37 76.17,22.96 74.45,22.96 72.52,24.89 v71.3,24.89 | 87.81,21.49 88.27,21.95 TP2.P$1 | 87.81,21.49 v87.66,21.64
BOOT2  (via drill 0.3)
  Top 0.2: v1.5,49.6 1.5,50.55 R49.2 1.95,50.1 v6.7,50.1 | IC2.44 5.95,61.75 7.7,60 v7.7,58.7
  Bottom 0.2: v1.5,49.6 BOOT1.1 | v6.7,50.1 7.1,50.5 7.1,55.1 7.7,55.7 v7.7,58.7
BOOT3
  Top 0.2: IC2.20 4.45,74.2 R53.2
BOOT4  (via drill 0.3)
  Top 0.2: v28.9,49.6 28.9,50.55 R66.2 29.35,50.1 v34.1,50.1 | IC1.44 33.35,61.75 35.1,60 v35.1,58.7
  Bottom 0.2: v28.9,49.6 BOOT2.1 | v34.1,50.1 34.5,50.5 34.5,55.1 35.1,55.7 v35.1,58.7
BOOT5
  Top 0.2: IC1.20 31.85,74.2 R70.2
BOOT6  (via drill 0.3)
  Top 0.2: v56.3,49.6 56.3,50.55 R83.2 56.75,50.1 v61.5,50.1 | IC3.44 60.75,61.75 62.5,60 v62.5,58.7
  Bottom 0.2: v56.3,49.6 BOOT3.1 | v61.5,50.1 61.9,50.5 61.9,55.1 62.5,55.7 v62.5,58.7
BOOT7
  Top 0.2: IC3.20 59.25,74.2 R87.2
CAN2_RX  (via drill 0.3)
  Top 0.203: U1.33 32.77,21.7 33.63,22.55 v33.93,22.55 | v41.66,27.43 43.24,27.43 J2.6
  Route2 0.203: v33.93,22.55 34.24,22.55 39.12,27.43 v41.66,27.43
  Bottom 0.203: J2.6 41.73,27.51 v41.66,27.43
CAN2_RX1  (via drill 0.3)
  Top 0.203: U13.33 85.17,21.7 86.03,22.55 v86.33,22.55 | v94.06,27.43 95.64,27.43 J11.6
  Route2 0.203: v86.33,22.55 86.64,22.55 91.52,27.43 v94.06,27.43
  Bottom 0.203: J11.6 94.13,27.51 v94.06,27.43
CAN2_TX  (via drill 0.3)
  Top 0.203: U1.34 30.48,21.44 30.48,21.13 30.79,20.83 32.61,20.83 33.73,21.95 v34.44,21.95 | J2.5 47.02,27.51 v46.94,27.43
  Route2 0.203: v34.44,21.95 39.12,26.62 46.13,26.62 v46.94,27.43
  Bottom 0.203: v46.94,27.43 47.02,27.51 J2.5 48.55,27.43 v46.94,27.43
CAN2_TX1  (via drill 0.3)
  Top 0.203: U13.34 82.88,21.44 82.88,21.13 83.19,20.83 85.01,20.83 86.13,21.95 v86.84,21.95 | J11.5 99.42,27.51 v99.34,27.43
  Route2 0.203: v86.84,21.95 91.52,26.62 98.53,26.62 v99.34,27.43
  Bottom 0.203: v99.34,27.43 99.42,27.51 J11.5 100.95,27.43 v99.34,27.43
GND  (via drill 0.3)
  Top 0.203: U11.11 23.29,9.19 22.96,8.87 22.96,8.46 23.22,8.2 23.81,8.2
  Top 0.254: C14.2 41.13,10.92 | C17.1 C1.2 14.43,33.63 14.67,33.87 S1.B3 18.07,33.87 J6.9 J6.5 J6.3 | C25.2 C21.2 | R12.1 C5.2 12.83,7.37 v12.75,7.29 | U8.1 U8.2 U8.3 U8.4 v18.09,1.41 19.59,1.41 U10.1 | U9.13 U9.12 32.22,12.1 32.31,12.19 32.92,12.19 | 32.92,12.19 33.12,12.19 33.22,12.1 U9.10 | C8.2 C11.2 32.38,14.29 R5.2 32.78,12.33 32.92,12.19 | U1.18 27.03,13.46 27.03,13.01 26.62,12.6 26.01,12.6 | U9.16 30.3,9.46 C18.2 29.46,9.54 v29.46,9.04 | C20.2 C19.2 v27.03,3.86 27.8,3.09 U12.8 29.19,2.31 29.36,2.13 30.08,2.13 U12.9 U12.10 U12.11 U12.12 32.85,2.16 33.02,2.34 | 40.64,7.87 C13.C 40.19,7.32 | C2.2 15.14,21.64 v15.54,22.05 16.15,22.66 17.83,22.66 U1.63 | 26.01,12.6 24.99,13.61 v24.99,13.82 | v23.16,15.85 22.77,15.85 U1.12 | 30.18,31.7 v28.45,31.7 | 30.18,31.7 30.28,31.7 | v37.19,10.97 36.98,10.77 C16.2 | 43.36,29.46 J2.4 | v46.94,29.46 46.94,29.51 | U6.1 35.76,17.88 | U9.5 34.14,8.11 v34.14,7.52 | v3.45,13.51 3.47,13.53 | C7.2 39.42,27.95 | 25.53,29.23 25.4,29.23 | C9.2 25.6,29.23 25.53,29.23 | R13.1 25.53,29.23 | C3.2 16.18,12.83 16.87,13.51 17.48,13.51 X1.4 17.89,13.11 18.29,13.11 | v46.94,5.49 46.96,5.51 | R18.1 33.88,18.95 v34.95,17.88 | X1.2 15.69,18.69 v15.54,18.69 16.53,19.68 C10.2 | v25.6,6.81 25.27,7.14 C23.2 25.16,7.82 24.59,7.82 24.22,8.19 U11.9 23.81,8.2 | C22.2 25.26,11.85 26.01,12.6 | J5.GND2 35.27,31.33 | U3.2 8.34,23.16 8.13,23.37 7.52,23.37 v7.01,22.86 | U2.2 11.43,21.9 11.28,21.74 10.57,21.74 v10.26,22.05 | U4.2 8.34,19 v8.13,19.2 | U5.4 9.39,11.21 v9.35,11.18 | J5.GND3 30.16,31.69 30.18,31.7 | R21.1 34.29,1.07 33.02,2.34 | 33.02,2.34 33.02,3.06 U12.13
  Top 0.305: 19.23,12.57 C4.1 | 19.23,12.57 18.69,13.11 18.29,13.11 | 19.23,12.57 19.23,11.55 v19.3,11.48 20.37,11.48 C15.2 | v37.19,4.78 37.19,4.47 36.88,4.17 36.26,4.17 C25.2
  Top 0.381: C16.2 35.7,10.92 | C9.2 C12.2 | 39.42,27.95 v39.42,29.67
  Top 0.406: 3.89,3.43 v3.86,3.45 3.99,3.33 J4.5 | J4.1 v5.19,8.22 v5.18,8.23 | C12.2 29.43,30.5 J5.GND3 | J5.GND3 30.16,33.08 J5.GND4 | J5.5 30.66,30.73 J5.GND3 | v36.58,31.7 35.64,31.7 J5.GND2 35.26,31.32 35.26,32.82 35.61,33.18 J5.GND1
  Top 0.508: 41.13,10.92 U7.2 | C8.2 34.3,15.86 U6.1 | C14.2 40.64,10.14 40.64,7.87 | 40.19,7.32 v41.45,7.32 | v44.91,29.46 43.36,29.46 | 46.94,29.51 J2.3 | v37.59,14.22 C6.C | 35.76,17.88 v34.95,17.88 | 3.47,13.53 J1.15 | 46.96,5.51 J2.27
  Bottom 0.254: 48.59,29.46 J2.3 | J2.4 43.36,29.46 | v46.94,5.49 46.96,5.51 | X3.5 17.72,1.78 v18.09,1.41 | v25.6,6.81 25.6,6.71
  Bottom 0.508: v46.94,29.46 48.59,29.46 | 43.36,29.46 v44.91,29.46 | 46.96,5.51 J2.27
  other vias: 33.93,1.42
  pour Route15: -0.41,35.46 -0.41,-0.3 50.7,-0.3 50.7,35.46
GND1  (via drill 0.3)
  Top 0.203: U24.11 75.69,9.19 75.36,8.87 75.36,8.46 75.62,8.2 76.21,8.2